# EAGLE board SparkFun_XBee_Arduino_Shield_Qwiic-Panel (EAGLE 9.6.2), part 1 of 3
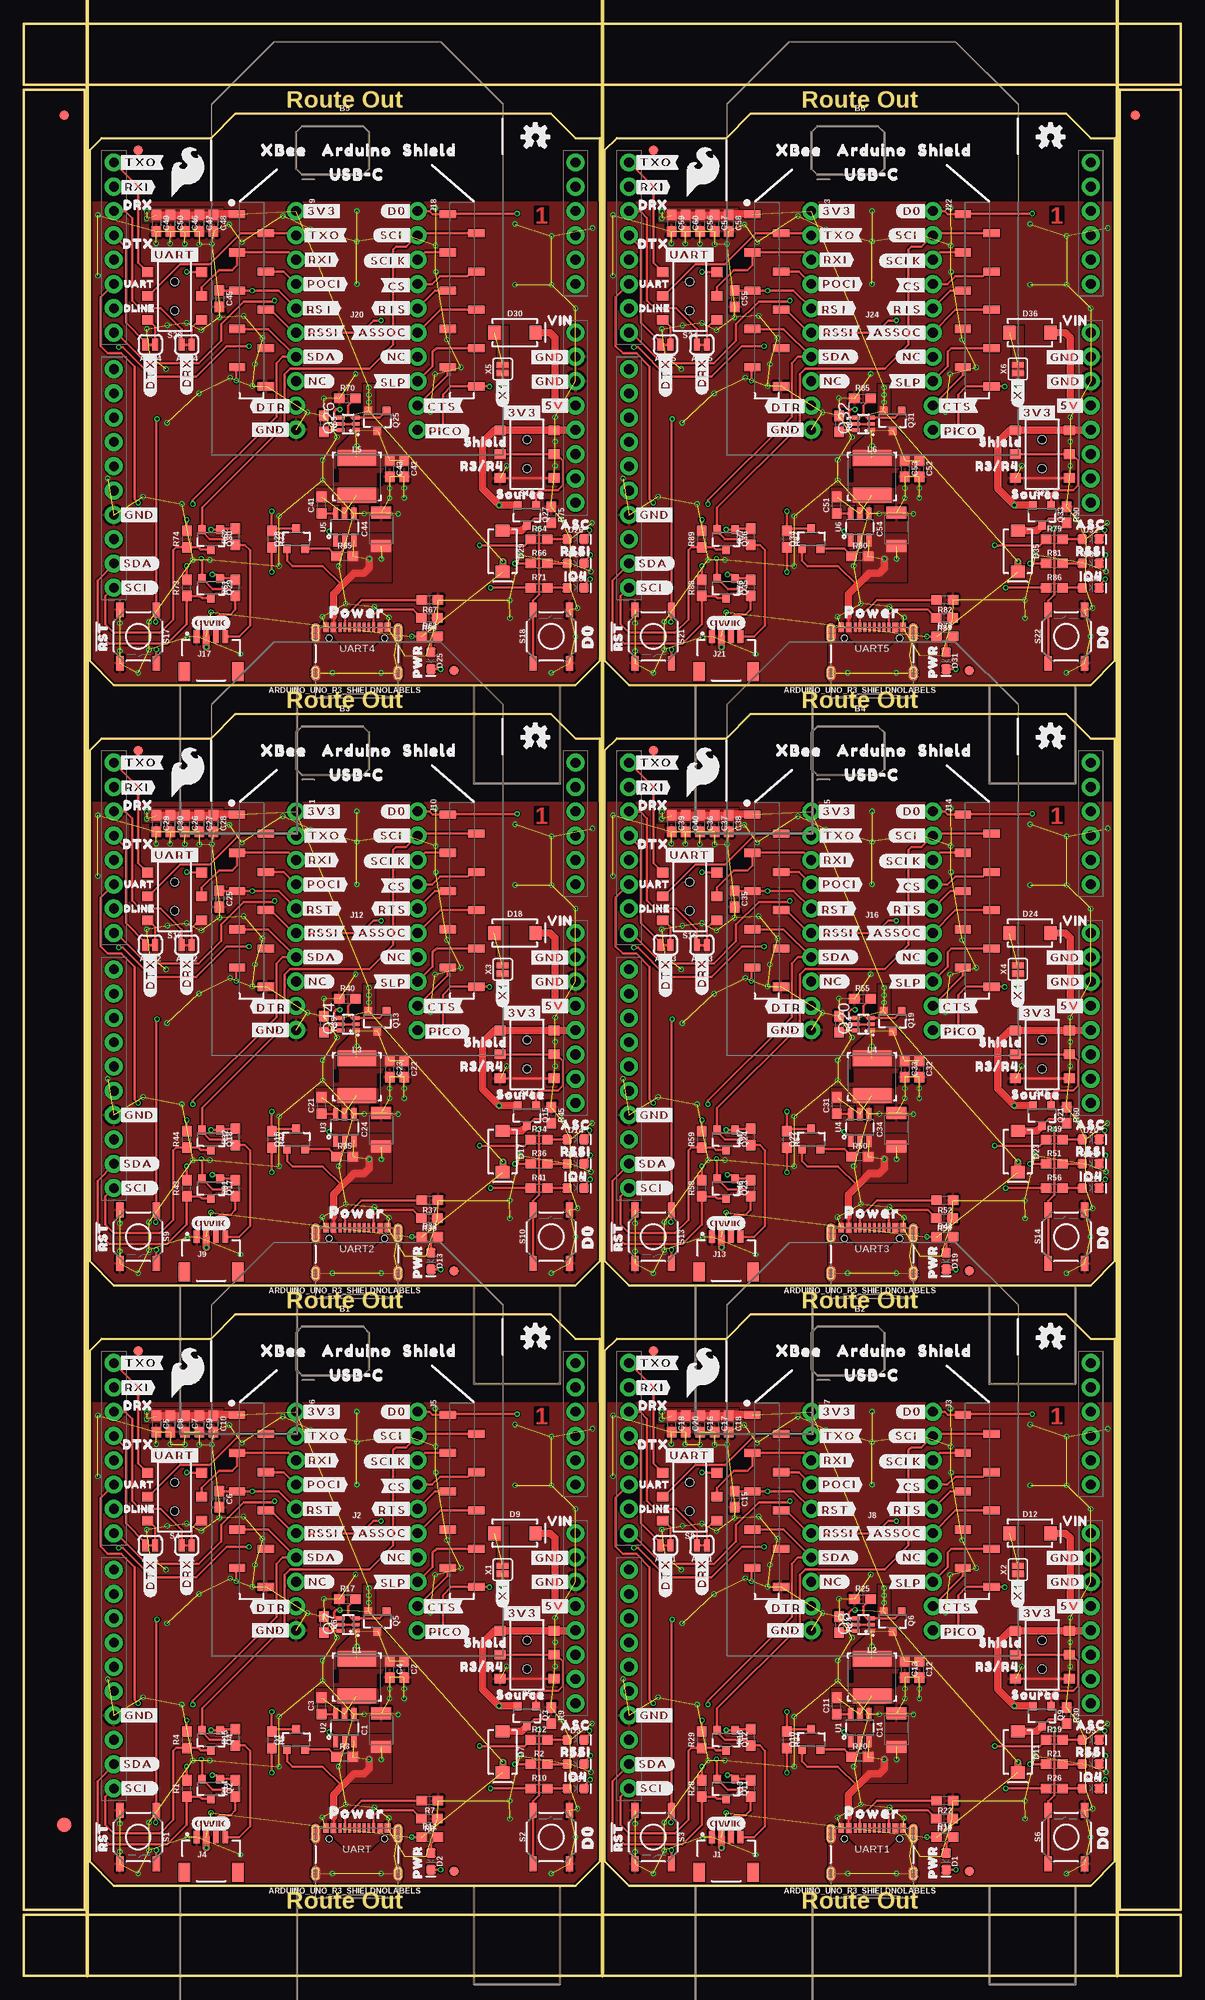
[diagram p0: board, top side]
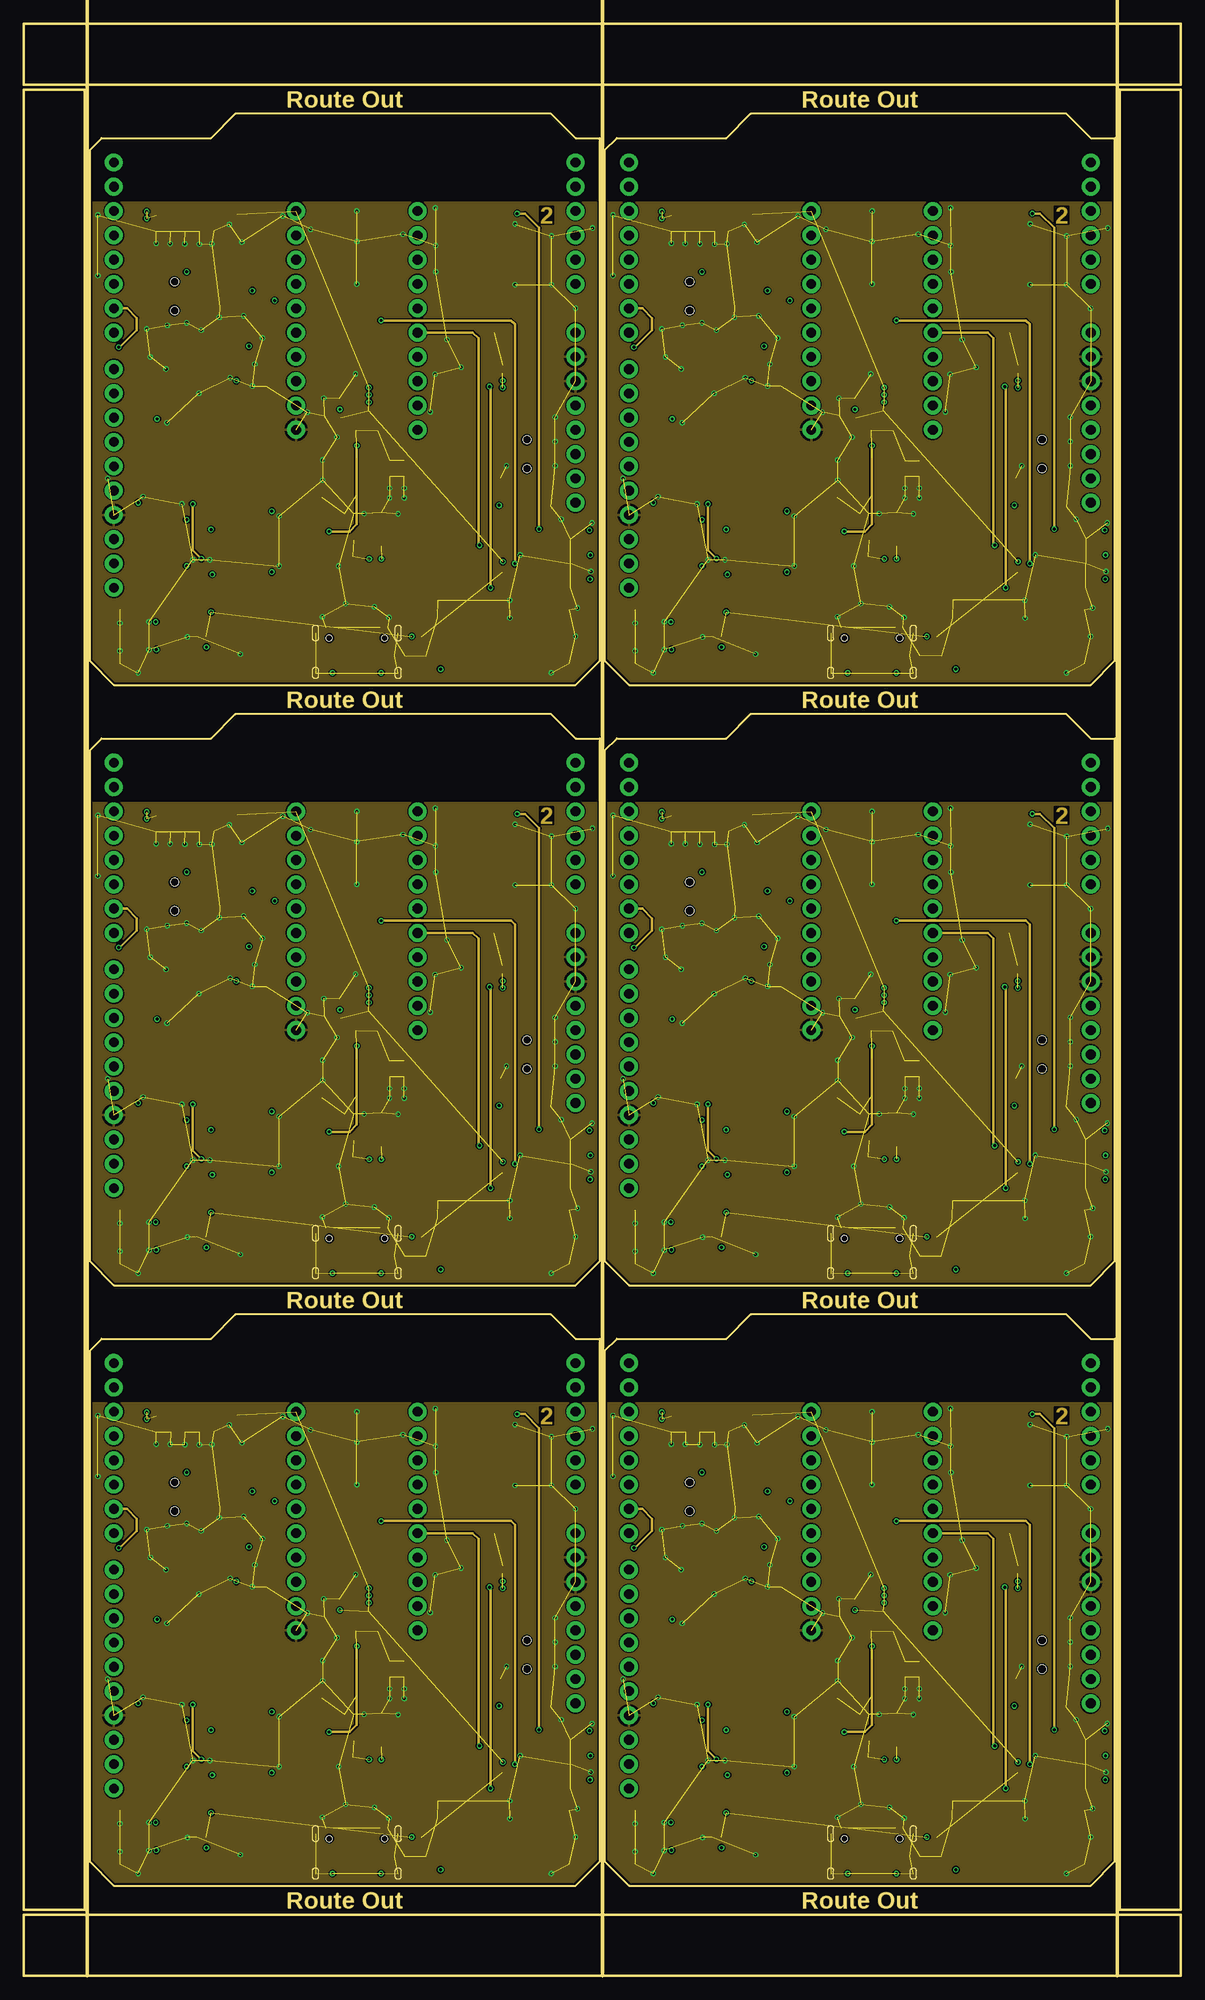
[diagram p1: board, inner layer Route2]
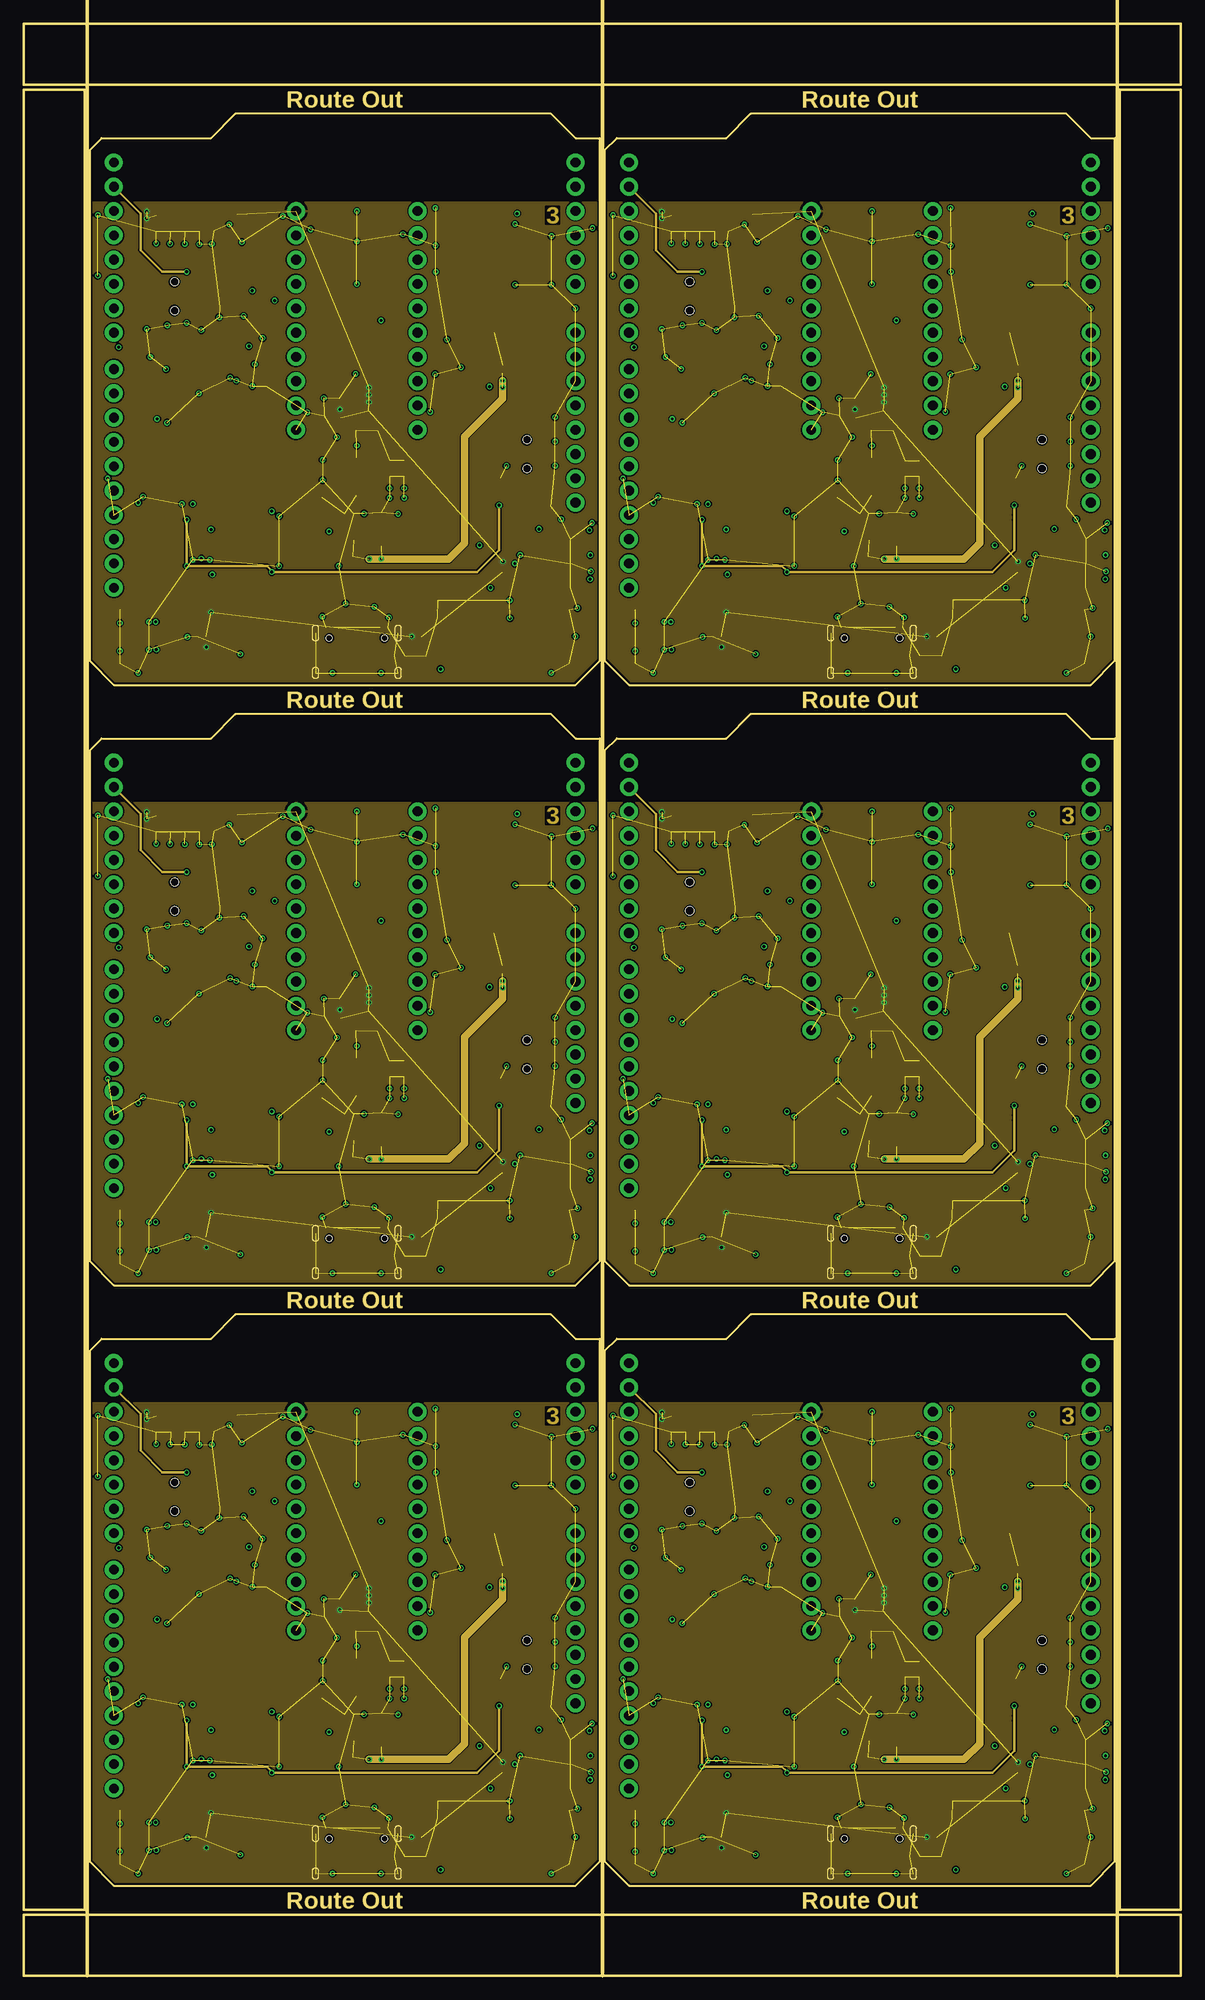
[diagram p2: board, inner layer Route15]
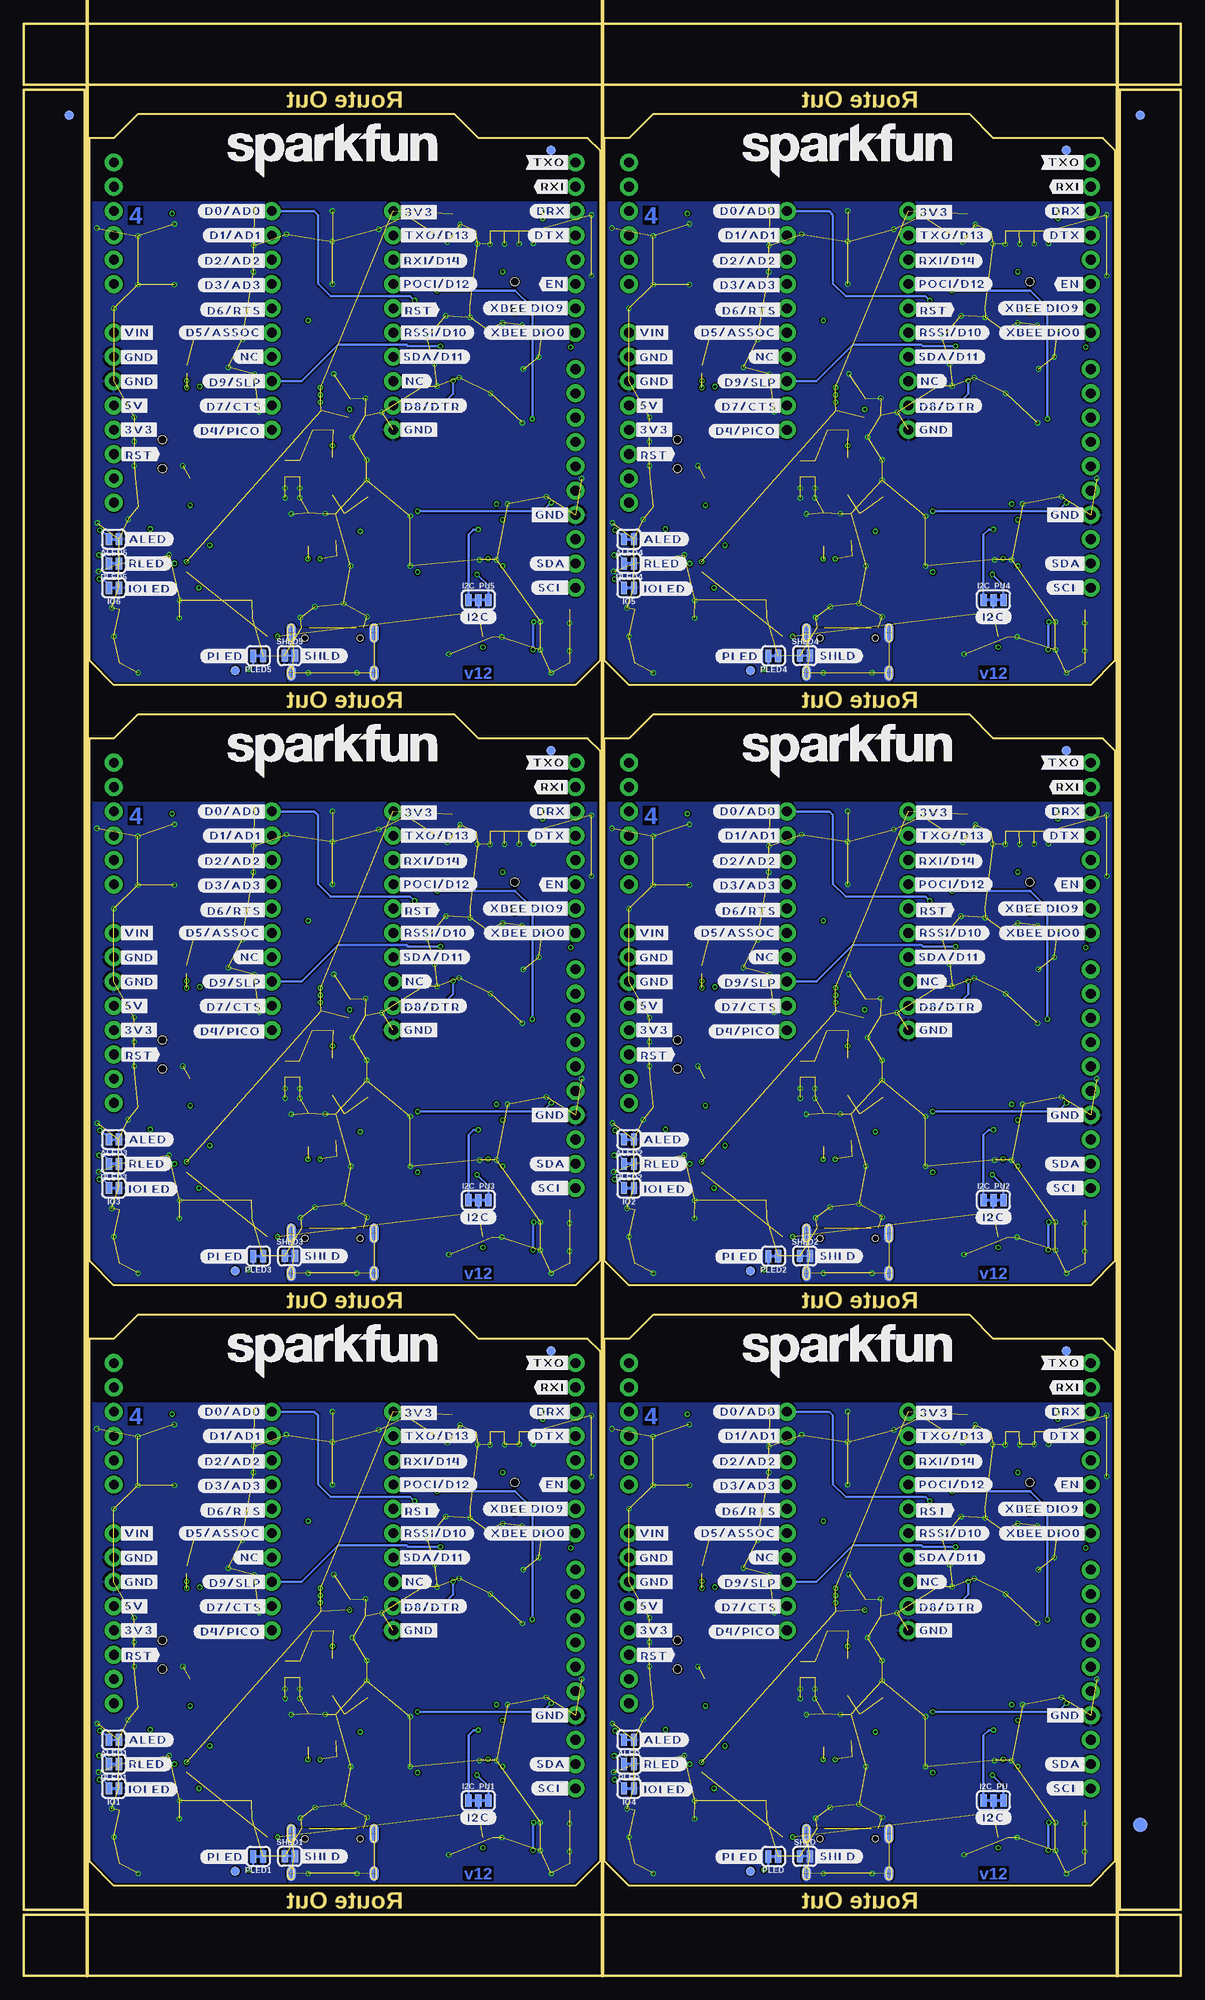
[diagram p3: board, bottom side, seen from below]

Size 120.9 x 203.96 mm. Coordinates in mm from the lower left corner, seen from the top.
Outline: 6.86,65.28 6.86,11.94 9.4,9.4 57.66,9.4 60.2,11.94 60.2,66.55 57.66,66.55 55.12,69.09 22.1,69.09 19.56,66.55 8.13,66.55 6.86,65.28
Outline: 60.71,65.28 60.71,11.94 63.25,9.4 111.51,9.4 114.05,11.94 114.05,66.55 111.51,66.55 108.97,69.09 75.95,69.09 73.41,66.55 61.98,66.55 60.71,65.28
Outline: 6.86,128.02 6.86,74.68 9.4,72.14 57.66,72.14 60.2,74.68 60.2,129.29 57.66,129.29 55.12,131.83 22.1,131.83 19.56,129.29 8.13,129.29 6.86,128.02
Outline: 60.71,128.02 60.71,74.68 63.25,72.14 111.51,72.14 114.05,74.68 114.05,129.29 111.51,129.29 108.97,131.83 75.95,131.83 73.41,129.29 61.98,129.29 60.71,128.02
Outline: 6.86,190.75 6.86,137.41 9.4,134.87 57.66,134.87 60.2,137.41 60.2,192.02 57.66,192.02 55.12,194.56 22.1,194.56 19.56,192.02 8.13,192.02 6.86,190.75
Outline: 60.71,190.75 60.71,137.41 63.25,134.87 111.51,134.87 114.05,137.41 114.05,192.02 111.51,192.02 108.97,194.56 75.95,194.56 73.41,192.02 61.98,192.02 60.71,190.75
Outline: 0,6.35 120.9,6.35 120.9,0 0,0 0,6.35
Outline: 114.55,197.1 120.9,197.1 120.9,6.86 114.55,6.86 114.55,197.1
Outline: 0,203.96 120.9,203.96 120.9,197.61 0,197.61 0,203.96
Outline: 0,197.1 6.35,197.1 6.35,6.86 0,6.86 0,197.1
Copper layers (1*2*15*16): Top 0.035559375mm / dielectric 0.47751875mm / Route2 0.035559375mm / dielectric 0.47751875mm / Route15 0.035559375mm / dielectric 0.47751875mm / Bottom 0.035559375mm
Design rules "SparkFun_XBee_Arduino_Shield_Qwiic": minimum track width 5mil, minimum drill 0.2mm, track to track 5mil, track to pad 5mil, pad to pad 5mil, via to via 5mil, smd to smd 5mil, copper to edge 7mil, drill to drill 7mil, minimum pad ring 5mil, minimum via ring 5mil, stop-mask expansion 2.5mil, vias tented up to drill 25mil, thermal gap 10mil
tRestrict: area 37,30.3 to 37.4,31.4; area 32.4,30.7 to 32.8,31.9; area 90.9,30.3 to 91.3,31.4; area 86.2,30.7 to 86.6,31.9; area 37,93 to 37.4,94.2; area 32.4,93.4 to 32.8,94.6; area 90.9,93 to 91.3,94.2; area 86.2,93.4 to 86.6,94.6; area 37,155.8 to 37.4,156.9; area 32.4,156.2 to 32.8,157.3; area 90.9,155.8 to 91.3,156.9; area 86.2,156.2 to 86.6,157.3
Milling: 4 lines

## Footprints (pad centres in the part's own frame; a part is rotated, then mirrored left to right if it is on the bottom)
SMT-JUMPER_2_NC_TRACE_SILK = smd 0.66 x 1.27: 1 -0.521,0; 2 0.521,0
UNO_R3_SHIELD_NOLABELS = drill 1.016 pad 1.88: 3.3V 24.13,-3.81; 5V 24.13,-1.27; A0 24.13,11.43; A1 24.13,13.97; A2 24.13,16.51; A3 24.13,19.05; A4 24.13,21.59; A5 24.13,24.13; AREF -24.13,-15.24; D2 -24.13,19.05; D3 -24.13,16.51; D4 -24.13,13.97; D5 -24.13,11.43; D6 -24.13,8.89; D7 -24.13,6.35; D8 -24.13,2.54; D9 -24.13,0; D10 -24.13,-2.54; D11 -24.13,-5.08; D12 -24.13,-7.62; D13 -24.13,-10.16; GND@0 24.13,1.27; GND@1 24.13,3.81; GND@2 -24.13,-12.7; IOREF 24.13,-8.89; NC 24.13,-11.43; RES 24.13,-6.35; RX -24.13,24.13; SCL -24.13,-20.32; SDA -24.13,-17.78; TX -24.13,21.59; VIN 24.13,6.35
1210 = smd 1.27 x 2.06: 1 -1.755,0; 2 1.755,0
0603 = smd 1.1 x 1: 1 -0.85,0; 2 0.85,0
LED-0603 = smd 1 x 1: A -0.877,0; C 0.877,0
SMA-DIODE = smd 1.27 x 1.47: A -2.15,0; C 2.15,0
FIDUCIAL-1X2 = smd 1 x 1: 1 0,0
FIDUCIAL-1.5X3 = smd 1.5 x 1.5: 1 0,0
SMT-JUMPER_3_2-NC_TRACE_SILK = smd 0.66 x 1.27: 1 -1.041,0; 2 0,0; 3 1.041,0
JST04_1MM_RA = smd 0.6 x 1.35: 1 -1.5,0; 2 -0.5,0; 3 0.5,0; 4 1.5,0 | smd 1.2 x 2: NC1 2.8,-3.675; NC2 -2.8,-3.675
XBEE3-SMD = smd 1.7 x 0.85: 1 -12.5,11.11; 2 -9.5,9.11; 3 -12.5,7.11; 4 -9.5,5.11; 5 -12.5,3.11; 6 -9.5,1.11; 7 -12.5,-0.89; 8 -9.5,-2.89; 9 -12.5,-4.89; 10 -9.5,-6.89; 11 12.5,-6.89; 12 9.5,-4.89; 13 12.5,-2.89; 14 9.5,-0.89; 15 12.5,1.11; 16 9.5,3.11; 17 12.5,5.11; 18 9.5,7.11; 19 12.5,9.11; 20 9.5,11.11
1X10_NO_SILK = drill 1.016 pad 1.88: 1 0,0; 2 2.54,0; 3 5.08,0; 4 7.62,0; 5 10.16,0; 6 12.7,0; 7 15.24,0; 8 17.78,0; 9 20.32,0; 10 22.86,0
INDUCTOR_3.9UH = smd 4 x 1.6: P$1 0,-2; P$2 0,1.9
SOT23-3 = smd 0.8 x 0.9: 1 -0.95,-1; 2 0.95,-1; 3 0,1.1
SOT363_PHILIPS = smd 0.4 x 0.8: 1 -0.65,-0.8; 2 0,-0.8; 3 0.65,-0.8; 4 0.65,0.8; 5 0,0.8; 6 -0.65,0.8
TACTILE_SWITCH_SMD_5.2MM = smd 1.524 x 0.762: 1 -2.794,1.905; 2 2.794,1.905; 3 -2.794,-1.905; 4 2.794,-1.905
SWITCH_DPDT_SMD_AYZ0202 = smd 1 x 1.15: 1 -2.5,2.825; 2 0,2.825; 3 2.5,2.825; 4 -2.5,-2.825; 5 0,-2.825; 6 2.5,-2.825 | hole 0.85: 1.5,0; -1.5,0
SOT23-6 = smd 0.55 x 1.35: 1 -0.95,-1.375; 2 0,-1.375; 3 0.95,-1.375; 4 0.95,1.375; 5 0,1.375; 6 -0.95,1.375
USB-C-16P-4LAYER-ISOLATED = smd 0.3 x 1: A5 -1.25,-0.34; A6 -0.25,-0.34; A7 0.25,-0.34; A8 1.25,-0.34; B5 1.75,-0.34; B6 0.75,-0.34; B7 -0.75,-0.34; B8 -1.75,-0.34 | smd 0.6 x 1: GND -3.225,-0.34; GND2 3.225,-0.34; VBUS1 -2.45,-0.34; VBUS2 2.45,-0.34 | smd 1 x 2.1: SHLD1 -4.32,-0.915; SHLD2 4.32,-0.915 | smd 1 x 2.1 bottom: SHLD3 -4.32,-0.915; SHLD4 4.32,-0.915 | smd 1 x 1.6: SHLD5 -4.32,-5.095; SHLD8 4.32,-5.095 | smd 1 x 1.6 bottom: SHLD6 -4.32,-5.095; SHLD7 4.32,-5.095 | hole 0.65: -2.89,-1.445; 2.89,-1.445
SMT-JUMPER_2_NO_SILK = smd 0.635 x 1.27: 1 -0.406,0; 2 0.406,0

## Placement (x,y rotation side)
ALED  JUMPER-SMT_2_NC_TRACE_SILK  [SMT-JUMPER_2_NC_TRACE_SILK]  57.66,24.64 180 bottom
ALED1  JUMPER-SMT_2_NC_TRACE_SILK  [SMT-JUMPER_2_NC_TRACE_SILK]  111.51,24.64 180 bottom
ALED2  JUMPER-SMT_2_NC_TRACE_SILK  [SMT-JUMPER_2_NC_TRACE_SILK]  57.66,87.38 180 bottom
ALED3  JUMPER-SMT_2_NC_TRACE_SILK  [SMT-JUMPER_2_NC_TRACE_SILK]  111.51,87.38 180 bottom
ALED4  JUMPER-SMT_2_NC_TRACE_SILK  [SMT-JUMPER_2_NC_TRACE_SILK]  57.66,150.11 180 bottom
ALED5  JUMPER-SMT_2_NC_TRACE_SILK  [SMT-JUMPER_2_NC_TRACE_SILK]  111.51,150.11 180 bottom
ARX  JUMPER-SMT_2_NC_TRACE_SILK  [SMT-JUMPER_2_NC_TRACE_SILK]  17.02,44.96 180 top
ARX1  JUMPER-SMT_2_NC_TRACE_SILK  [SMT-JUMPER_2_NC_TRACE_SILK]  70.87,44.96 180 top
ARX2  JUMPER-SMT_2_NC_TRACE_SILK  [SMT-JUMPER_2_NC_TRACE_SILK]  17.02,107.7 180 top
ARX3  JUMPER-SMT_2_NC_TRACE_SILK  [SMT-JUMPER_2_NC_TRACE_SILK]  70.87,107.7 180 top
ARX4  JUMPER-SMT_2_NC_TRACE_SILK  [SMT-JUMPER_2_NC_TRACE_SILK]  17.02,170.43 180 top
ARX5  JUMPER-SMT_2_NC_TRACE_SILK  [SMT-JUMPER_2_NC_TRACE_SILK]  70.87,170.43 180 top
ATX  JUMPER-SMT_2_NC_TRACE_SILK  [SMT-JUMPER_2_NC_TRACE_SILK]  13.21,44.96 180 top
ATX1  JUMPER-SMT_2_NC_TRACE_SILK  [SMT-JUMPER_2_NC_TRACE_SILK]  67.06,44.96 180 top
ATX2  JUMPER-SMT_2_NC_TRACE_SILK  [SMT-JUMPER_2_NC_TRACE_SILK]  13.21,107.7 180 top
ATX3  JUMPER-SMT_2_NC_TRACE_SILK  [SMT-JUMPER_2_NC_TRACE_SILK]  67.06,107.7 180 top
ATX4  JUMPER-SMT_2_NC_TRACE_SILK  [SMT-JUMPER_2_NC_TRACE_SILK]  13.21,170.43 180 top
ATX5  JUMPER-SMT_2_NC_TRACE_SILK  [SMT-JUMPER_2_NC_TRACE_SILK]  67.06,170.43 180 top
B1  ARDUINO_UNO_R3_SHIELDNOLABELS  [UNO_R3_SHIELD_NOLABELS]  33.53,39.88 0 top
B2  ARDUINO_UNO_R3_SHIELDNOLABELS  [UNO_R3_SHIELD_NOLABELS]  87.38,39.88 0 top
B3  ARDUINO_UNO_R3_SHIELDNOLABELS  [UNO_R3_SHIELD_NOLABELS]  33.53,102.62 0 top
B4  ARDUINO_UNO_R3_SHIELDNOLABELS  [UNO_R3_SHIELD_NOLABELS]  87.38,102.62 0 top
B5  ARDUINO_UNO_R3_SHIELDNOLABELS  [UNO_R3_SHIELD_NOLABELS]  33.53,165.35 0 top
B6  ARDUINO_UNO_R3_SHIELDNOLABELS  [UNO_R3_SHIELD_NOLABELS]  87.38,165.35 0 top
C1  10uF  [1210]  37.34,25.65 90 top
C2  22uF  [0603]  39.75,32 270 top
C3  0.1uF  [0603]  31.12,28.19 90 top
C4  22uF  [0603]  38.23,32 270 top
C5  47pF  [0603]  13.84,57.66 270 top
C6  10nF  [0603]  20.45,49.78 270 top
C7  10nF  [0603]  16.84,57.66 270 top
C8  10pF  [0603]  15.32,57.66 270 top
C9  0.1uF  [0603]  18.34,57.66 270 top
C10  10uF  [0603]  19.81,57.66 270 top
C11  0.1uF  [0603]  84.96,28.19 90 top
C12  22uF  [0603]  93.6,32 270 top
C13  22uF  [0603]  92.08,32 270 top
C14  10uF  [1210]  91.19,25.65 90 top
C15  10nF  [0603]  74.3,49.78 270 top
C16  10nF  [0603]  70.69,57.66 270 top
C17  0.1uF  [0603]  72.19,57.66 270 top
C18  10uF  [0603]  73.66,57.66 270 top
C19  47pF  [0603]  67.69,57.66 270 top
C20  10pF  [0603]  69.16,57.66 270 top
C21  0.1uF  [0603]  31.12,90.93 90 top
C22  22uF  [0603]  39.75,94.74 270 top
C23  22uF  [0603]  38.23,94.74 270 top
C24  10uF  [1210]  37.34,88.39 90 top
C25  10nF  [0603]  20.45,112.52 270 top
C26  10nF  [0603]  16.84,120.4 270 top
C27  0.1uF  [0603]  18.34,120.4 270 top
C28  10uF  [0603]  19.81,120.4 270 top
C29  47pF  [0603]  13.84,120.4 270 top
C30  10pF  [0603]  15.32,120.4 270 top
C31  0.1uF  [0603]  84.96,90.93 90 top
C32  22uF  [0603]  93.6,94.74 270 top
C33  22uF  [0603]  92.08,94.74 270 top
C34  10uF  [1210]  91.19,88.39 90 top
C35  10nF  [0603]  74.3,112.52 270 top
C36  10nF  [0603]  70.69,120.4 270 top
C37  0.1uF  [0603]  72.19,120.4 270 top
C38  10uF  [0603]  73.66,120.4 270 top
C39  47pF  [0603]  67.69,120.4 270 top
C40  10pF  [0603]  69.16,120.4 270 top
C41  0.1uF  [0603]  31.12,153.67 90 top
C42  22uF  [0603]  39.75,157.48 270 top
C43  22uF  [0603]  38.23,157.48 270 top
C44  10uF  [1210]  37.34,151.13 90 top
C45  10nF  [0603]  20.45,175.26 270 top
C46  10nF  [0603]  16.84,183.13 270 top
C47  0.1uF  [0603]  18.34,183.13 270 top
C48  10uF  [0603]  19.81,183.13 270 top
C49  47pF  [0603]  13.84,183.13 270 top
C50  10pF  [0603]  15.32,183.13 270 top
C51  0.1uF  [0603]  84.96,153.67 90 top
C52  22uF  [0603]  93.6,157.48 270 top
C53  22uF  [0603]  92.08,157.48 270 top
C54  10uF  [1210]  91.19,151.13 90 top
C55  10nF  [0603]  74.3,175.26 270 top
C56  10nF  [0603]  70.69,183.13 270 top
C57  0.1uF  [0603]  72.19,183.13 270 top
C58  10uF  [0603]  73.66,183.13 270 top
C59  47pF  [0603]  67.69,183.13 270 top
C60  10pF  [0603]  69.16,183.13 270 top
D1  RED  [LED-0603]  96.39,11.94 270 top
D2  RED  [LED-0603]  42.54,11.94 270 top
D3  BLUE  [LED-0603]  57.66,24.64 0 top
D4  Yellow  [LED-0603]  57.66,22.1 0 top
D5  BLUE  [LED-0603]  111.51,24.64 0 top
D6  GREEN  [LED-0603]  57.66,19.56 0 top
D7  3A/40V/500mV  [SMA-DIODE]  50.04,23.37 270 top
D8  Yellow  [LED-0603]  111.51,22.1 0 top
D9  3A/40V/500mV  [SMA-DIODE]  51.31,46.23 0 top
D10  GREEN  [LED-0603]  111.51,19.56 0 top
D11  3A/40V/500mV  [SMA-DIODE]  103.89,23.37 270 top
D12  3A/40V/500mV  [SMA-DIODE]  105.16,46.23 0 top
D13  RED  [LED-0603]  42.54,74.68 270 top
D14  BLUE  [LED-0603]  57.66,87.38 0 top
D15  Yellow  [LED-0603]  57.66,84.84 0 top
D16  GREEN  [LED-0603]  57.66,82.3 0 top
D17  3A/40V/500mV  [SMA-DIODE]  50.04,86.11 270 top
D18  3A/40V/500mV  [SMA-DIODE]  51.31,108.97 0 top
D19  RED  [LED-0603]  96.39,74.68 270 top
D20  BLUE  [LED-0603]  111.51,87.38 0 top
D21  Yellow  [LED-0603]  111.51,84.84 0 top
D22  GREEN  [LED-0603]  111.51,82.3 0 top
D23  3A/40V/500mV  [SMA-DIODE]  103.89,86.11 270 top
D24  3A/40V/500mV  [SMA-DIODE]  105.16,108.97 0 top
D25  RED  [LED-0603]  42.54,137.41 270 top
D26  BLUE  [LED-0603]  57.66,150.11 0 top
D27  Yellow  [LED-0603]  57.66,147.57 0 top
D28  GREEN  [LED-0603]  57.66,145.03 0 top
D29  3A/40V/500mV  [SMA-DIODE]  50.04,148.84 270 top
D30  3A/40V/500mV  [SMA-DIODE]  51.31,171.7 0 top
D31  RED  [LED-0603]  96.39,137.41 270 top
D32  BLUE  [LED-0603]  111.51,150.11 0 top
D33  Yellow  [LED-0603]  111.51,147.57 0 top
D34  GREEN  [LED-0603]  111.51,145.03 0 top
D35  3A/40V/500mV  [SMA-DIODE]  103.89,148.84 270 top
D36  3A/40V/500mV  [SMA-DIODE]  105.16,171.7 0 top
E$1  [FIDUCIAL-1X2]  4.23,194.44 0 top
E$2  [FIDUCIAL-1X2]  4.23,194.44 0 bottom
E$3  [FIDUCIAL-1X2]  116.16,194.44 0 top
E$4  [FIDUCIAL-1X2]  116.16,194.44 0 bottom
E$5  [FIDUCIAL-1.5X3]  4.23,15.75 0 top
E$6  [FIDUCIAL-1.5X3]  4.23,15.75 0 bottom
FD1  FIDUCIAL1X2  [FIDUCIAL-1X2]  11.94,65.28 0 top
FD2  FIDUCIAL1X2  [FIDUCIAL-1X2]  11.94,65.28 0 bottom
FD3  FIDUCIAL1X2  [FIDUCIAL-1X2]  44.96,10.92 0 top
FD4  FIDUCIAL1X2  [FIDUCIAL-1X2]  44.96,10.92 0 bottom
FD5  FIDUCIAL1X2  [FIDUCIAL-1X2]  65.79,65.28 0 top
FD6  FIDUCIAL1X2  [FIDUCIAL-1X2]  65.79,65.28 0 bottom
FD7  FIDUCIAL1X2  [FIDUCIAL-1X2]  98.81,10.92 0 top
FD8  FIDUCIAL1X2  [FIDUCIAL-1X2]  98.81,10.92 0 bottom
FD9  FIDUCIAL1X2  [FIDUCIAL-1X2]  11.94,128.02 0 top
FD10  FIDUCIAL1X2  [FIDUCIAL-1X2]  11.94,128.02 0 bottom
FD11  FIDUCIAL1X2  [FIDUCIAL-1X2]  44.96,73.66 0 top
FD12  FIDUCIAL1X2  [FIDUCIAL-1X2]  44.96,73.66 0 bottom
FD13  FIDUCIAL1X2  [FIDUCIAL-1X2]  65.79,128.02 0 top
FD14  FIDUCIAL1X2  [FIDUCIAL-1X2]  65.79,128.02 0 bottom
FD15  FIDUCIAL1X2  [FIDUCIAL-1X2]  98.81,73.66 0 top
FD16  FIDUCIAL1X2  [FIDUCIAL-1X2]  98.81,73.66 0 bottom
FD17  FIDUCIAL1X2  [FIDUCIAL-1X2]  11.94,190.75 0 top
FD18  FIDUCIAL1X2  [FIDUCIAL-1X2]  11.94,190.75 0 bottom
FD19  FIDUCIAL1X2  [FIDUCIAL-1X2]  44.96,136.4 0 top
FD20  FIDUCIAL1X2  [FIDUCIAL-1X2]  44.96,136.4 0 bottom
FD21  FIDUCIAL1X2  [FIDUCIAL-1X2]  65.79,190.75 0 top
FD22  FIDUCIAL1X2  [FIDUCIAL-1X2]  65.79,190.75 0 bottom
FD23  FIDUCIAL1X2  [FIDUCIAL-1X2]  98.81,136.4 0 top
FD24  FIDUCIAL1X2  [FIDUCIAL-1X2]  98.81,136.4 0 bottom
I2C_PU  JUMPER-SMT_3_2-NC_TRACE_SILK  [SMT-JUMPER_3_2-NC_TRACE_SILK]  19.56,18.29 0 bottom
I2C_PU1  JUMPER-SMT_3_2-NC_TRACE_SILK  [SMT-JUMPER_3_2-NC_TRACE_SILK]  73.41,18.29 0 bottom
I2C_PU2  JUMPER-SMT_3_2-NC_TRACE_SILK  [SMT-JUMPER_3_2-NC_TRACE_SILK]  19.56,81.03 0 bottom
I2C_PU3  JUMPER-SMT_3_2-NC_TRACE_SILK  [SMT-JUMPER_3_2-NC_TRACE_SILK]  73.41,81.03 0 bottom
I2C_PU4  JUMPER-SMT_3_2-NC_TRACE_SILK  [SMT-JUMPER_3_2-NC_TRACE_SILK]  19.56,143.76 0 bottom
I2C_PU5  JUMPER-SMT_3_2-NC_TRACE_SILK  [SMT-JUMPER_3_2-NC_TRACE_SILK]  73.41,143.76 0 bottom
IO1  JUMPER-SMT_2_NC_TRACE_SILK  [SMT-JUMPER_2_NC_TRACE_SILK]  111.51,19.56 180 bottom
IO2  JUMPER-SMT_2_NC_TRACE_SILK  [SMT-JUMPER_2_NC_TRACE_SILK]  57.66,82.3 180 bottom
IO3  JUMPER-SMT_2_NC_TRACE_SILK  [SMT-JUMPER_2_NC_TRACE_SILK]  111.51,82.3 180 bottom
IO4  JUMPER-SMT_2_NC_TRACE_SILK  [SMT-JUMPER_2_NC_TRACE_SILK]  57.66,19.56 180 bottom
IO5  JUMPER-SMT_2_NC_TRACE_SILK  [SMT-JUMPER_2_NC_TRACE_SILK]  57.66,145.03 180 bottom
IO6  JUMPER-SMT_2_NC_TRACE_SILK  [SMT-JUMPER_2_NC_TRACE_SILK]  111.51,145.03 180 bottom
J1  QWIIC_RIGHT_ANGLE  [JST04_1MM_RA]  73.41,14.48 0 top
J2  [XBEE3-SMD]  34.8,47.5 0 top
J3  [1X10_NO_SILK]  95,58.93 270 top
J4  QWIIC_RIGHT_ANGLE  [JST04_1MM_RA]  19.56,14.48 0 top
J5  [1X10_NO_SILK]  41.15,58.93 270 top
J6  [1X10_NO_SILK]  28.45,58.93 270 top
J7  [1X10_NO_SILK]  82.3,58.93 270 top
J8  [XBEE3-SMD]  88.65,47.5 0 top
J9  QWIIC_RIGHT_ANGLE  [JST04_1MM_RA]  19.56,77.22 0 top
J10  [1X10_NO_SILK]  41.15,121.67 270 top
J11  [1X10_NO_SILK]  28.45,121.67 270 top
J12  [XBEE3-SMD]  34.8,110.24 0 top
J13  QWIIC_RIGHT_ANGLE  [JST04_1MM_RA]  73.41,77.22 0 top
J14  [1X10_NO_SILK]  95,121.67 270 top
J15  [1X10_NO_SILK]  82.3,121.67 270 top
J16  [XBEE3-SMD]  88.65,110.24 0 top
J17  QWIIC_RIGHT_ANGLE  [JST04_1MM_RA]  19.56,139.95 0 top
J18  [1X10_NO_SILK]  41.15,184.4 270 top
J19  [1X10_NO_SILK]  28.45,184.4 270 top
J20  [XBEE3-SMD]  34.8,172.97 0 top
J21  QWIIC_RIGHT_ANGLE  [JST04_1MM_RA]  73.41,139.95 0 top
J22  [1X10_NO_SILK]  95,184.4 270 top
J23  [1X10_NO_SILK]  82.3,184.4 270 top
J24  [XBEE3-SMD]  88.65,172.97 0 top
L1  3.9UH  [INDUCTOR_3.9UH]  34.8,31.24 0 top
L2  3.9UH  [INDUCTOR_3.9UH]  88.65,31.24 0 top
L3  3.9UH  [INDUCTOR_3.9UH]  34.8,93.98 0 top
L4  3.9UH  [INDUCTOR_3.9UH]  88.65,93.98 0 top
L5  3.9UH  [INDUCTOR_3.9UH]  34.8,156.72 0 top
L6  3.9UH  [INDUCTOR_3.9UH]  88.65,156.72 0 top
LOGO1  SFE_LOGO_NAMEBLANK  [BLANK]  6.86,9.4 0 top
LOGO2  OSHW-LOGOS  [OSHW-LOGO-S]  53.47,66.67 0 top
LOGO3  QWIIC_LOGO_4MM  [QWIIC_4MM]  19.56,15.88 0 top
LOGO4  OSHW-LOGOS  [OSHW-LOGO-S]  107.31,66.67 0 top
LOGO5  QWIIC_LOGO_4MM  [QWIIC_4MM]  73.41,15.88 0 top
LOGO6  SFE_LOGO_NAMEBLANK  [BLANK]  60.71,9.4 0 top
LOGO7  OSHW-LOGOS  [OSHW-LOGO-S]  53.47,129.41 0 top
LOGO8  QWIIC_LOGO_4MM  [QWIIC_4MM]  19.56,78.61 0 top
LOGO9  SFE_LOGO_NAMEBLANK  [BLANK]  6.86,72.14 0 top
LOGO10  OSHW-LOGOS  [OSHW-LOGO-S]  107.31,129.41 0 top
LOGO11  QWIIC_LOGO_4MM  [QWIIC_4MM]  73.41,78.61 0 top
LOGO12  SFE_LOGO_NAMEBLANK  [BLANK]  60.71,72.14 0 top
LOGO13  OSHW-LOGOS  [OSHW-LOGO-S]  53.47,192.15 0 top
LOGO14  QWIIC_LOGO_4MM  [QWIIC_4MM]  19.56,141.35 0 top
LOGO15  SFE_LOGO_NAMEBLANK  [BLANK]  6.86,134.87 0 top
LOGO16  OSHW-LOGOS  [OSHW-LOGO-S]  107.31,192.15 0 top
LOGO17  QWIIC_LOGO_4MM  [QWIIC_4MM]  73.41,141.35 0 top
LOGO18  SFE_LOGO_NAMEBLANK  [BLANK]  60.71,134.87 0 top
PLED  JUMPER-SMT_2_NC_TRACE_SILK  [SMT-JUMPER_2_NC_TRACE_SILK]  42.57,12.45 180 bottom
PLED1  JUMPER-SMT_2_NC_TRACE_SILK  [SMT-JUMPER_2_NC_TRACE_SILK]  96.42,12.45 180 bottom
PLED2  JUMPER-SMT_2_NC_TRACE_SILK  [SMT-JUMPER_2_NC_TRACE_SILK]  42.57,75.18 180 bottom
PLED3  JUMPER-SMT_2_NC_TRACE_SILK  [SMT-JUMPER_2_NC_TRACE_SILK]  96.42,75.18 180 bottom
PLED4  JUMPER-SMT_2_NC_TRACE_SILK  [SMT-JUMPER_2_NC_TRACE_SILK]  42.57,137.92 180 bottom
PLED5  JUMPER-SMT_2_NC_TRACE_SILK  [SMT-JUMPER_2_NC_TRACE_SILK]  96.42,137.92 180 bottom
Q1  220mA/50V/3.5Ω  [SOT23-3]  28.45,24.64 0 top
Q2  220mA/50V/3.5Ω  [SOT23-3]  19.56,19.56 180 top
Q3  3.1A/30V/105mΩ  [SOT23-3]  52.58,27.18 180 top
Q4  220mA/50V/3.5Ω  [SOT23-3]  19.56,24.64 180 top
Q5  20V/4.2A/52mΩ/1.4W  [SOT23-3]  36.96,37.06 180 top
Q6  20V/4.2A/52mΩ/1.4W  [SOT23-3]  90.81,37.06 180 top
Q7  [SOT363_PHILIPS]  33.91,36.68 90 top
Q8  [SOT363_PHILIPS]  87.76,36.68 90 top
Q9  3.1A/30V/105mΩ  [SOT23-3]  106.43,27.18 180 top
Q10  220mA/50V/3.5Ω  [SOT23-3]  82.3,24.64 0 top
Q11  220mA/50V/3.5Ω  [SOT23-3]  73.41,19.56 180 top
Q12  220mA/50V/3.5Ω  [SOT23-3]  73.41,24.64 180 top
Q13  20V/4.2A/52mΩ/1.4W  [SOT23-3]  36.96,99.8 180 top
Q14  [SOT363_PHILIPS]  33.91,99.42 90 top
Q15  3.1A/30V/105mΩ  [SOT23-3]  52.58,89.92 180 top
Q16  220mA/50V/3.5Ω  [SOT23-3]  28.45,87.38 0 top
Q17  220mA/50V/3.5Ω  [SOT23-3]  19.56,82.3 180 top
Q18  220mA/50V/3.5Ω  [SOT23-3]  19.56,87.38 180 top
Q19  20V/4.2A/52mΩ/1.4W  [SOT23-3]  90.81,99.8 180 top
Q20  [SOT363_PHILIPS]  87.76,99.42 90 top
Q21  3.1A/30V/105mΩ  [SOT23-3]  106.43,89.92 180 top
Q22  220mA/50V/3.5Ω  [SOT23-3]  82.3,87.38 0 top
Q23  220mA/50V/3.5Ω  [SOT23-3]  73.41,82.3 180 top
Q24  220mA/50V/3.5Ω  [SOT23-3]  73.41,87.38 180 top
Q25  20V/4.2A/52mΩ/1.4W  [SOT23-3]  36.96,162.53 180 top
Q26  [SOT363_PHILIPS]  33.91,162.15 90 top
Q27  3.1A/30V/105mΩ  [SOT23-3]  52.58,152.65 180 top
Q28  220mA/50V/3.5Ω  [SOT23-3]  28.45,150.11 0 top
Q29  220mA/50V/3.5Ω  [SOT23-3]  19.56,145.03 180 top
Q30  220mA/50V/3.5Ω  [SOT23-3]  19.56,150.11 180 top
Q31  20V/4.2A/52mΩ/1.4W  [SOT23-3]  90.81,162.53 180 top
Q32  [SOT363_PHILIPS]  87.76,162.15 90 top
Q33  3.1A/30V/105mΩ  [SOT23-3]  106.43,152.65 180 top
Q34  220mA/50V/3.5Ω  [SOT23-3]  82.3,150.11 0 top
Q35  220mA/50V/3.5Ω  [SOT23-3]  73.41,145.03 180 top
Q36  220mA/50V/3.5Ω  [SOT23-3]  73.41,150.11 180 top
R1  2.2k  [0603]  17.02,19.56 90 top
R2  2.2k  [0603]  53.85,22.1 0 top
R3  100k  [0603]  33.53,22.86 0 top
R4  2.2k  [0603]  17.02,24.64 90 top
R5  10k  [0603]  25.91,24.64 270 top
R6  100k  [0603]  31.37,36.68 270 top
R7  5.1k  [0603]  42.42,18.29 180 top
R8  5.1k  [0603]  42.37,16.41 180 top
R9  100k  [0603]  55.12,27.18 270 top
R10  330  [0603]  53.85,19.56 0 top
R11  4.7k  [0603]  42.42,14.48 0 top
R12  2.2k  [0603]  53.85,24.64 0 top
R13  2.2k  [0603]  75.95,19.56 90 top
R14  2.2k  [0603]  22.1,19.56 90 top
R15  2.2k  [0603]  22.1,24.89 90 top
R16  2.2k  [0603]  75.95,24.89 90 top
R17  1M  [0603]  33.81,39.34 0 top
R18  4.7k  [0603]  96.27,14.48 0 top
R19  2.2k  [0603]  107.7,24.64 0 top
R20  100k  [0603]  87.38,22.86 0 top
R21  2.2k  [0603]  107.7,22.1 0 top
R22  5.1k  [0603]  96.27,18.29 180 top
R23  5.1k  [0603]  96.22,16.41 180 top
R24  100k  [0603]  85.22,36.68 270 top
R25  1M  [0603]  87.66,39.34 0 top
R26  330  [0603]  107.7,19.56 0 top
R27  10k  [0603]  79.76,24.64 270 top
R28  2.2k  [0603]  70.87,19.56 90 top
R29  2.2k  [0603]  70.87,24.64 90 top
R30  100k  [0603]  108.97,27.18 270 top
R31  2.2k  [0603]  22.1,82.3 90 top
R32  2.2k  [0603]  22.1,87.63 90 top
R33  4.7k  [0603]  42.42,77.22 0 top
R34  2.2k  [0603]  53.85,87.38 0 top
R35  100k  [0603]  33.53,85.6 0 top
R36  2.2k  [0603]  53.85,84.84 0 top
R37  5.1k  [0603]  42.42,81.03 180 top
R38  5.1k  [0603]  42.37,79.15 180 top
R39  100k  [0603]  31.37,99.42 270 top
R40  1M  [0603]  33.81,102.08 0 top
R41  330  [0603]  53.85,82.3 0 top
R42  10k  [0603]  25.91,87.38 270 top
R43  2.2k  [0603]  17.02,82.3 90 top
R44  2.2k  [0603]  17.02,87.38 90 top
R45  100k  [0603]  55.12,89.92 270 top
R46  2.2k  [0603]  75.95,82.3 90 top
R47  2.2k  [0603]  75.95,87.63 90 top
R48  4.7k  [0603]  96.27,77.22 0 top
R49  2.2k  [0603]  107.7,87.38 0 top
R50  100k  [0603]  87.38,85.6 0 top
R51  2.2k  [0603]  107.7,84.84 0 top
R52  5.1k  [0603]  96.27,81.03 180 top
R53  5.1k  [0603]  96.22,79.15 180 top
R54  100k  [0603]  85.22,99.42 270 top
R55  1M  [0603]  87.66,102.08 0 top
R56  330  [0603]  107.7,82.3 0 top
R57  10k  [0603]  79.76,87.38 270 top
R58  2.2k  [0603]  70.87,82.3 90 top
R59  2.2k  [0603]  70.87,87.38 90 top
R60  100k  [0603]  108.97,89.92 270 top
R61  2.2k  [0603]  22.1,145.03 90 top
R62  2.2k  [0603]  22.1,150.37 90 top
R63  4.7k  [0603]  42.42,139.95 0 top
R64  2.2k  [0603]  53.85,150.11 0 top
R65  100k  [0603]  33.53,148.34 0 top
R66  2.2k  [0603]  53.85,147.57 0 top
R67  5.1k  [0603]  42.42,143.76 180 top
R68  5.1k  [0603]  42.37,141.88 180 top
R69  100k  [0603]  31.37,162.15 270 top
R70  1M  [0603]  33.81,164.82 0 top
R71  330  [0603]  53.85,145.03 0 top
R72  10k  [0603]  25.91,150.11 270 top
R73  2.2k  [0603]  17.02,145.03 90 top
R74  2.2k  [0603]  17.02,150.11 90 top
R75  100k  [0603]  55.12,152.65 270 top
R76  2.2k  [0603]  75.95,145.03 90 top
R77  2.2k  [0603]  75.95,150.37 90 top
R78  4.7k  [0603]  96.27,139.95 0 top
R79  2.2k  [0603]  107.7,150.11 0 top
R80  100k  [0603]  87.38,148.34 0 top
R81  2.2k  [0603]  107.7,147.57 0 top
R82  5.1k  [0603]  96.27,143.76 180 top
R83  5.1k  [0603]  96.22,141.88 180 top
R84  100k  [0603]  85.22,162.15 270 top
R85  1M  [0603]  87.66,164.82 0 top
R86  330  [0603]  107.7,145.03 0 top
R87  10k  [0603]  79.76,150.11 270 top
R88  2.2k  [0603]  70.87,145.03 90 top
R89  2.2k  [0603]  70.87,150.11 90 top
R90  100k  [0603]  108.97,152.65 270 top
RLED  JUMPER-SMT_2_NC_TRACE_SILK  [SMT-JUMPER_2_NC_TRACE_SILK]  57.66,22.1 180 bottom
RLED1  JUMPER-SMT_2_NC_TRACE_SILK  [SMT-JUMPER_2_NC_TRACE_SILK]  111.51,22.1 180 bottom
RLED2  JUMPER-SMT_2_NC_TRACE_SILK  [SMT-JUMPER_2_NC_TRACE_SILK]  57.66,84.84 180 bottom
RLED3  JUMPER-SMT_2_NC_TRACE_SILK  [SMT-JUMPER_2_NC_TRACE_SILK]  111.51,84.84 180 bottom
RLED4  JUMPER-SMT_2_NC_TRACE_SILK  [SMT-JUMPER_2_NC_TRACE_SILK]  57.66,147.57 180 bottom
RLED5  JUMPER-SMT_2_NC_TRACE_SILK  [SMT-JUMPER_2_NC_TRACE_SILK]  111.51,147.57 180 bottom
S1  [TACTILE_SWITCH_SMD_5.2MM]  11.94,14.48 270 top
S2  [TACTILE_SWITCH_SMD_5.2MM]  55.12,14.48 90 top
S3  [TACTILE_SWITCH_SMD_5.2MM]  65.79,14.48 270 top
S4  [SWITCH_DPDT_SMD_AYZ0202]  15.75,50.04 90 top
S5  [SWITCH_DPDT_SMD_AYZ0202]  52.58,33.53 90 top
S6  [TACTILE_SWITCH_SMD_5.2MM]  108.97,14.48 90 top
S7  [SWITCH_DPDT_SMD_AYZ0202]  106.43,33.53 90 top
S8  [SWITCH_DPDT_SMD_AYZ0202]  69.6,50.04 90 top
S9  [TACTILE_SWITCH_SMD_5.2MM]  11.94,77.22 270 top
S10  [TACTILE_SWITCH_SMD_5.2MM]  55.12,77.22 90 top
S11  [SWITCH_DPDT_SMD_AYZ0202]  52.58,96.27 90 top
S12  [SWITCH_DPDT_SMD_AYZ0202]  15.75,112.78 90 top
S13  [TACTILE_SWITCH_SMD_5.2MM]  65.79,77.22 270 top
S14  [TACTILE_SWITCH_SMD_5.2MM]  108.97,77.22 90 top
S15  [SWITCH_DPDT_SMD_AYZ0202]  106.43,96.27 90 top
S16  [SWITCH_DPDT_SMD_AYZ0202]  69.6,112.78 90 top
S17  [TACTILE_SWITCH_SMD_5.2MM]  11.94,139.95 270 top
S18  [TACTILE_SWITCH_SMD_5.2MM]  55.12,139.95 90 top
S19  [SWITCH_DPDT_SMD_AYZ0202]  52.58,159 90 top
S20  [SWITCH_DPDT_SMD_AYZ0202]  15.75,175.51 90 top
S21  [TACTILE_SWITCH_SMD_5.2MM]  65.79,139.95 270 top
S22  [TACTILE_SWITCH_SMD_5.2MM]  108.97,139.95 90 top
S23  [SWITCH_DPDT_SMD_AYZ0202]  106.43,159 90 top
S24  [SWITCH_DPDT_SMD_AYZ0202]  69.6,175.51 90 top
SHLD  JUMPER-SMT_2_NC_TRACE_SILK  [SMT-JUMPER_2_NC_TRACE_SILK]  39.27,12.47 0 bottom
SHLD1  JUMPER-SMT_2_NC_TRACE_SILK  [SMT-JUMPER_2_NC_TRACE_SILK]  93.12,12.47 0 bottom
SHLD2  JUMPER-SMT_2_NC_TRACE_SILK  [SMT-JUMPER_2_NC_TRACE_SILK]  39.27,75.21 0 bottom
SHLD3  JUMPER-SMT_2_NC_TRACE_SILK  [SMT-JUMPER_2_NC_TRACE_SILK]  93.12,75.21 0 bottom
SHLD4  JUMPER-SMT_2_NC_TRACE_SILK  [SMT-JUMPER_2_NC_TRACE_SILK]  39.27,137.95 0 bottom
SHLD5  JUMPER-SMT_2_NC_TRACE_SILK  [SMT-JUMPER_2_NC_TRACE_SILK]  93.12,137.95 0 bottom
U1  AP63203  [SOT23-6]  87.38,25.91 0 top
U2  AP63203  [SOT23-6]  33.53,25.91 0 top
U3  AP63203  [SOT23-6]  33.53,88.65 0 top
U4  AP63203  [SOT23-6]  87.38,88.65 0 top
U5  AP63203  [SOT23-6]  33.53,151.38 0 top
U6  AP63203  [SOT23-6]  87.38,151.38 0 top
U$1  [RSSI31]  57.66,23.37 0 top
U$2  [PWR29]  41.15,11.84 90 top
U$3  [#SDA#10]  11.94,22.1 0 top
U$4  [#SHLD#36]  35.81,12.45 0 bottom
U$5  [#NC#1]  26.16,41.15 0 bottom
U$6  [#D3#AD3#23]  45.21,51.18 0 bottom
U$7  [#NC#3]  43.43,43.69 0 bottom
U$8  [##DTR##27]  25.83,38.53 0 top
U$9  [#NC#1]  30.73,41.15 0 top
U$10  [#NC#3]  38.99,43.69 0 top
U$11  [#D1#AD1#8]  44.96,56.39 0 bottom
U$12  [##CTS##28]  43.69,38.61 0 top
U$13  [#D8##DTR##27]  24.38,38.61 0 bottom
U$14  [#RSSI#D10#17]  24,46.23 0 bottom
U$15  [#SDA#D11#9]  24.26,43.69 0 bottom
U$16  [##RST##15]  25.78,48.64 0 bottom
U$17  [#POCI#D12#24]  23.88,51.31 0 bottom
U$18  [#RXI#D14#15]  24.38,53.72 0 bottom
U$19  [#D2#AD2#19]  45.21,53.72 0 bottom
U$20  [#D6##RTS##25]  45.08,48.64 0 bottom
U$21  [#TXO#8]  31.37,56.39 0 top
U$22  [#TXO#D13#13]  23.88,56.39 0 bottom
U$23  [VIN5]  56.03,47.5 0 top
U$24  [#SCL#7]  11.94,19.56 0 top
U$25  [#GND#0]  12.06,27.18 0 top
U$26  [#I2C#33]  19.56,16.51 0 bottom
U$27  [#RXI#7]  30.96,53.82 0 top
U$28  [DRX52]  11.94,59.56 0 top
U$29  [#GND#0]  54.99,41.12 0 top
U$30  [#RST#30]  8.13,14.48 90 top
U$31  [#PICO#27]  44.09,35.92 0 top
U$32  [#TXO#8]  12.19,64.01 0 top
U$33  [#RXI#7]  11.79,61.44 0 top
U$34  [DTX53]  11.94,55.5 0 top
U$35  [#D5#ASSOC#25]  46.23,46.23 0 bottom
U$36  [#D9##SLP##28]  44.96,41.15 0 bottom
U$37  [#D7##CTS##26]  45.08,38.61 0 bottom
U$38  [#D4#PICO#25]  45.47,35.94 0 bottom
U$39  [#5V#5]  55.5,38.61 0 top
U$40  [D03]  58.93,14.48 90 top
U$41  [#GND#0]  54.97,43.64 0 top
U$42  [DLINE45]  12.06,48.77 0 top
U$43  [#X1#10]  50.04,40.08 90 top
U$44  [#3V3#1]  52.07,37.85 0 top
U$45  [#POCI#32]  31.37,51.31 0 top
U$46  [SHIELD55]  48.26,34.8 0 top
U$47  [#3V3#1]  31.12,58.93 0 top
U$48  [UART44]  12.06,51.31 0 top
U$49  [#ALED#21]  54.1,24.64 0 bottom
U$50  [#GND#0]  25.76,36.07 0 top
U$51  [#RLED#22]  54.2,22.1 0 bottom
U$52  [#PLED#20]  46.02,12.4 0 bottom
U$53  [#GND#0]  55.02,43.64 0 bottom
U$54  [##RST##13]  30.99,48.77 0 top
U$55  [#RSSI#16]  31.24,46.23 0 top
U$56  [#SDA#10]  31.12,43.69 0 top
U$57  [#ASSOC#28]  37.46,46.23 0 top
U$58  [##RTS##14]  38.48,48.77 0 top
U$59  [##CS##26]  38.99,51.18 0 top
U$60  [#SCLK#33]  38.1,53.72 0 top
U$61  [SFE_LOGO_FLAME_.2]  17.14,62.99 0 top
U$62  [SFE_LOGO_NAME_.2]  34.8,65.28 0 bottom
U$63  [#GND#0]  54.99,41.12 0 bottom
U$64  [#SCL#9]  38.61,56.39 0 top
U$65  [#D0#3]  38.99,58.93 0 top
U$66  [#5V#5]  55.5,38.61 0 bottom
U$67  [#SDA#9]  11.94,22.1 0 bottom
U$68  [##SLP##28]  38.61,41.15 0 top
U$69  [R3#R455]  47.88,32.26 0 top
U$70  [#SCL#13]  11.94,19.56 0 bottom
U$71  [#DRX#56]  17.02,42.04 90 top
U$72  [#DTX#57]  13.21,41.91 90 top
U$73  [#TXO#61]  12.19,64.01 0 bottom
U$74  [ASC32]  57.66,26.16 0 top
U$75  [POWER49]  34.8,17.02 0 top
U$76  [#GND#0]  25.78,36.07 0 bottom
U$77  [#3V3#1]  25.78,58.8 0 bottom
U$78  [#D0#AD0#18]  45.21,58.93 0 bottom
U$79  [ARDUINO1345]  34.8,65.28 0 top
U$80  [XBEE340]  27.18,65.28 0 top
U$81  [SHIELD1346]  42.42,65.28 0 top
U$82  [#GND#0]  12.06,27.18 0 bottom
U$83  [#EN#15]  11.56,51.31 0 bottom
U$84  [#3V3#1]  55.04,36.07 0 bottom
U$85  [#RXI#60]  11.81,61.47 0 bottom
U$86  [#DRX#56]  11.94,58.93 0 bottom
U$87  [##RST##13]  54.99,33.53 0 bottom
U$88  [#VIN#4]  55.24,46.23 0 bottom
U$89  [#DTX#57]  12.06,56.39 0 bottom
U$90  [#XBEE_DIO0#62]  14.35,46.23 0 bottom
U$91  [#UART#4048234]  15.75,54.36 0 top
U$92  [#XBEE_DIO9#62]  14.48,48.77 0 bottom
U$93  [#IOLED#5]  53.92,19.46 0 bottom
U$94  [IO49]  57.68,20.75 0 top
U$95  [SOURCE54]  51.94,29.34 0 top
U$96  [USB#C58]  34.8,62.74 0 top
U$97  [#I2C#33]  73.41,16.51 0 bottom
U$98  [D03]  112.78,14.48 90 top
U$99  [#RST#30]  61.98,14.48 90 top
U$100  [SFE_LOGO_FLAME_.2]  70.99,62.99 0 top
U$101  [#D1#AD1#8]  98.81,56.39 0 bottom
U$102  [#D2#AD2#19]  99.06,53.72 0 bottom
U$103  [#D3#AD3#23]  99.06,51.18 0 bottom
U$104  [#D6##RTS##25]  98.93,48.64 0 bottom
U$105  [#D5#ASSOC#25]  100.08,46.23 0 bottom
U$106  [#D9##SLP##28]  98.81,41.15 0 bottom
U$107  [#D7##CTS##26]  98.93,38.61 0 bottom
U$108  [#D4#PICO#25]  99.31,35.94 0 bottom
U$109  [#D8##DTR##27]  78.23,38.61 0 bottom
U$110  [#RSSI#D10#17]  77.85,46.23 0 bottom
U$111  [#SDA#D11#9]  78.11,43.69 0 bottom
U$112  [##RST##15]  79.63,48.64 0 bottom
U$113  [#POCI#D12#24]  77.72,51.31 0 bottom
U$114  [#RXI#D14#15]  78.23,53.72 0 bottom
U$115  [#TXO#D13#13]  77.72,56.39 0 bottom
U$116  [#ALED#21]  107.95,24.64 0 bottom
U$117  [#RLED#22]  108.05,22.1 0 bottom
U$118  [#TXO#8]  85.22,56.39 0 top
U$119  [#RXI#7]  84.81,53.82 0 top
U$120  [#POCI#32]  85.22,51.31 0 top
U$121  [##RST##13]  84.84,48.77 0 top
U$122  [#RSSI#16]  85.09,46.23 0 top
U$123  [#SDA#10]  84.96,43.69 0 top
U$124  [#ASSOC#28]  91.31,46.23 0 top
U$125  [##RTS##14]  92.33,48.77 0 top
U$126  [##CS##26]  92.84,51.18 0 top
U$127  [#SCLK#33]  91.95,53.72 0 top
U$128  [#SCL#9]  92.46,56.39 0 top
U$129  [#D0#3]  92.84,58.93 0 top
U$130  [#SHLD#36]  89.66,12.45 0 bottom
U$131  [#NC#1]  80.01,41.15 0 bottom
U$132  [#NC#3]  97.28,43.69 0 bottom
U$133  [#NC#3]  92.84,43.69 0 top
U$134  [#GND#0]  108.84,41.12 0 top
U$135  [#NC#1]  84.58,41.15 0 top
U$136  [#SDA#10]  65.79,22.1 0 top
U$137  [#SCL#7]  65.79,19.56 0 top
U$138  [#GND#0]  65.91,27.18 0 top
U$139  [#TXO#8]  66.04,64.01 0 top
U$140  [#RXI#7]  65.63,61.44 0 top
U$141  [#3V3#1]  84.96,58.93 0 top
U$142  [#GND#0]  79.6,36.07 0 top
U$143  [SFE_LOGO_NAME_.2]  88.65,65.28 0 bottom
U$144  [##SLP##28]  92.46,41.15 0 top
U$145  [ASC32]  111.51,26.16 0 top
U$146  [RSSI31]  111.51,23.37 0 top
U$147  [PWR29]  95,11.84 90 top
U$148  [#GND#0]  79.63,36.07 0 bottom
U$149  [#3V3#1]  79.63,58.8 0 bottom
U$150  [#D0#AD0#18]  99.06,58.93 0 bottom
U$151  [ARDUINO1345]  88.65,65.28 0 top
U$152  [XBEE340]  81.03,65.28 0 top
U$153  [SHIELD1346]  96.27,65.28 0 top
U$154  [#5V#5]  109.35,38.61 0 top
U$155  [##DTR##27]  79.68,38.53 0 top
U$156  [##CTS##28]  97.54,38.61 0 top
U$157  [#GND#0]  108.81,43.64 0 top
U$158  [#3V3#1]  105.92,37.85 0 top
U$159  [#PLED#20]  99.87,12.4 0 bottom
U$160  [#IOLED#5]  107.77,19.46 0 bottom
U$161  [IO49]  111.53,20.75 0 top
U$162  [VIN5]  109.88,47.5 0 top
U$163  [#PICO#27]  97.94,35.92 0 top
U$164  [#X1#10]  103.89,40.08 90 top
U$165  [#GND#0]  108.86,43.64 0 bottom
U$166  [#GND#0]  108.84,41.12 0 bottom
U$167  [#5V#5]  109.35,38.61 0 bottom
U$168  [#SDA#9]  65.79,22.1 0 bottom
U$169  [#SCL#13]  65.79,19.56 0 bottom
U$170  [#GND#0]  65.91,27.18 0 bottom
U$171  [#EN#15]  65.41,51.31 0 bottom
U$172  [#3V3#1]  108.89,36.07 0 bottom
U$173  [##RST##13]  108.84,33.53 0 bottom
U$174  [#VIN#4]  109.09,46.23 0 bottom
U$175  [#UART#4048234]  69.6,54.36 0 top
U$176  [POWER49]  88.65,17.02 0 top
U$177  [DRX52]  65.79,59.56 0 top
U$178  [DTX53]  65.79,55.5 0 top
U$179  [DLINE45]  65.91,48.77 0 top
U$180  [UART44]  65.91,51.31 0 top
U$181  [#DRX#56]  70.87,42.04 90 top
U$182  [#DTX#57]  67.06,41.91 90 top
U$183  [#TXO#61]  66.04,64.01 0 bottom
U$184  [#RXI#60]  65.66,61.47 0 bottom
U$185  [#DRX#56]  65.79,58.93 0 bottom
U$186  [#DTX#57]  65.91,56.39 0 bottom
U$187  [#XBEE_DIO0#62]  68.2,46.23 0 bottom
U$188  [#XBEE_DIO9#62]  68.33,48.77 0 bottom
U$189  [SOURCE54]  105.79,29.34 0 top
U$190  [SHIELD55]  102.11,34.8 0 top
U$191  [R3#R455]  101.73,32.26 0 top
U$192  [USB#C58]  88.65,62.74 0 top
U$193  [#I2C#33]  19.56,79.25 0 bottom
U$194  [D03]  58.93,77.22 90 top
U$195  [#RST#30]  8.13,77.22 90 top
U$196  [SFE_LOGO_FLAME_.2]  17.14,125.73 0 top
U$197  [#D1#AD1#8]  44.96,119.13 0 bottom
U$198  [#D2#AD2#19]  45.21,116.46 0 bottom
U$199  [#D3#AD3#23]  45.21,113.92 0 bottom
U$200  [#D6##RTS##25]  45.08,111.38 0 bottom
U$201  [#D5#ASSOC#25]  46.23,108.97 0 bottom
U$202  [#D9##SLP##28]  44.96,103.89 0 bottom
U$203  [#D7##CTS##26]  45.08,101.35 0 bottom
U$204  [#D4#PICO#25]  45.47,98.68 0 bottom
U$205  [#D8##DTR##27]  24.38,101.35 0 bottom
U$206  [#RSSI#D10#17]  24,108.97 0 bottom
U$207  [#SDA#D11#9]  24.26,106.43 0 bottom
U$208  [##RST##15]  25.78,111.38 0 bottom
U$209  [#POCI#D12#24]  23.88,114.05 0 bottom
U$210  [#RXI#D14#15]  24.38,116.46 0 bottom
U$211  [#TXO#D13#13]  23.88,119.13 0 bottom
U$212  [#ALED#21]  54.1,87.38 0 bottom
U$213  [#RLED#22]  54.2,84.84 0 bottom
U$214  [#TXO#8]  31.37,119.13 0 top
U$215  [#RXI#7]  30.96,116.56 0 top
U$216  [#POCI#32]  31.37,114.05 0 top
U$217  [##RST##13]  30.99,111.51 0 top
U$218  [#RSSI#16]  31.24,108.97 0 top
U$219  [#SDA#10]  31.12,106.43 0 top
U$220  [#ASSOC#28]  37.46,108.97 0 top
U$221  [##RTS##14]  38.48,111.51 0 top
U$222  [##CS##26]  38.99,113.92 0 top
U$223  [#SCLK#33]  38.1,116.46 0 top
U$224  [#SCL#9]  38.61,119.13 0 top
U$225  [#D0#3]  38.99,121.67 0 top
U$226  [#SHLD#36]  35.81,75.18 0 bottom
U$227  [#NC#1]  26.16,103.89 0 bottom
U$228  [#NC#3]  43.43,106.43 0 bottom
U$229  [#NC#3]  38.99,106.43 0 top
U$230  [#GND#0]  54.99,103.86 0 top
U$231  [#NC#1]  30.73,103.89 0 top
U$232  [#SDA#10]  11.94,84.84 0 top
U$233  [#SCL#7]  11.94,82.3 0 top
U$234  [#GND#0]  12.06,89.92 0 top
U$235  [#TXO#8]  12.19,126.75 0 top
U$236  [#RXI#7]  11.79,124.18 0 top
U$237  [#3V3#1]  31.12,121.67 0 top
U$238  [#GND#0]  25.76,98.81 0 top
U$239  [SFE_LOGO_NAME_.2]  34.8,128.02 0 bottom
U$240  [##SLP##28]  38.61,103.89 0 top
U$241  [ASC32]  57.66,88.9 0 top
U$242  [RSSI31]  57.66,86.11 0 top
U$243  [PWR29]  41.15,74.57 90 top
U$244  [#GND#0]  25.78,98.81 0 bottom
U$245  [#3V3#1]  25.78,121.54 0 bottom
U$246  [#D0#AD0#18]  45.21,121.67 0 bottom
U$247  [ARDUINO1345]  34.8,128.02 0 top
U$248  [XBEE340]  27.18,128.02 0 top
U$249  [SHIELD1346]  42.42,128.02 0 top
U$250  [#5V#5]  55.5,101.35 0 top
U$251  [##DTR##27]  25.83,101.27 0 top
U$252  [##CTS##28]  43.69,101.35 0 top
U$253  [#GND#0]  54.97,106.38 0 top
U$254  [#3V3#1]  52.07,100.58 0 top
U$255  [#PLED#20]  46.02,75.13 0 bottom
U$256  [#IOLED#5]  53.92,82.19 0 bottom
U$257  [IO49]  57.68,83.49 0 top
U$258  [VIN5]  56.03,110.24 0 top
U$259  [#PICO#27]  44.09,98.65 0 top
U$260  [#X1#10]  50.04,102.82 90 top
U$261  [#GND#0]  55.02,106.38 0 bottom
U$262  [#GND#0]  54.99,103.86 0 bottom
U$263  [#5V#5]  55.5,101.35 0 bottom
U$264  [#SDA#9]  11.94,84.84 0 bottom
U$265  [#SCL#13]  11.94,82.3 0 bottom
U$266  [#GND#0]  12.06,89.92 0 bottom
U$267  [#EN#15]  11.56,114.05 0 bottom
U$268  [#3V3#1]  55.04,98.81 0 bottom
U$269  [##RST##13]  54.99,96.27 0 bottom
U$270  [#VIN#4]  55.24,108.97 0 bottom
U$271  [#UART#4048234]  15.75,117.09 0 top
U$272  [POWER49]  34.8,79.76 0 top
U$273  [DRX52]  11.94,122.3 0 top
U$274  [DTX53]  11.94,118.24 0 top
U$275  [DLINE45]  12.06,111.51 0 top
U$276  [UART44]  12.06,114.05 0 top
U$277  [#DRX#56]  17.02,104.77 90 top
U$278  [#DTX#57]  13.21,104.65 90 top
U$279  [#TXO#61]  12.19,126.75 0 bottom
U$280  [#RXI#60]  11.81,124.21 0 bottom
U$281  [#DRX#56]  11.94,121.67 0 bottom
U$282  [#DTX#57]  12.06,119.13 0 bottom
U$283  [#XBEE_DIO0#62]  14.35,108.97 0 bottom
U$284  [#XBEE_DIO9#62]  14.48,111.51 0 bottom
U$285  [SOURCE54]  51.94,92.08 0 top
U$286  [SHIELD55]  48.26,97.54 0 top
U$287  [R3#R455]  47.88,95 0 top
U$288  [USB#C58]  34.8,125.48 0 top
U$289  [#I2C#33]  73.41,79.25 0 bottom
U$290  [D03]  112.78,77.22 90 top
U$291  [#RST#30]  61.98,77.22 90 top
U$292  [SFE_LOGO_FLAME_.2]  70.99,125.73 0 top
U$293  [#D1#AD1#8]  98.81,119.13 0 bottom
U$294  [#D2#AD2#19]  99.06,116.46 0 bottom
U$295  [#D3#AD3#23]  99.06,113.92 0 bottom
U$296  [#D6##RTS##25]  98.93,111.38 0 bottom
U$297  [#D5#ASSOC#25]  100.08,108.97 0 bottom
U$298  [#D9##SLP##28]  98.81,103.89 0 bottom
U$299  [#D7##CTS##26]  98.93,101.35 0 bottom
U$300  [#D4#PICO#25]  99.31,98.68 0 bottom
U$301  [#D8##DTR##27]  78.23,101.35 0 bottom
U$302  [#RSSI#D10#17]  77.85,108.97 0 bottom
U$303  [#SDA#D11#9]  78.11,106.43 0 bottom
U$304  [##RST##15]  79.63,111.38 0 bottom
U$305  [#POCI#D12#24]  77.72,114.05 0 bottom
U$306  [#RXI#D14#15]  78.23,116.46 0 bottom
U$307  [#TXO#D13#13]  77.72,119.13 0 bottom
U$308  [#ALED#21]  107.95,87.38 0 bottom
U$309  [#RLED#22]  108.05,84.84 0 bottom
U$310  [#TXO#8]  85.22,119.13 0 top
U$311  [#RXI#7]  84.81,116.56 0 top
U$312  [#POCI#32]  85.22,114.05 0 top
U$313  [##RST##13]  84.84,111.51 0 top
U$314  [#RSSI#16]  85.09,108.97 0 top
U$315  [#SDA#10]  84.96,106.43 0 top
U$316  [#ASSOC#28]  91.31,108.97 0 top
U$317  [##RTS##14]  92.33,111.51 0 top
U$318  [##CS##26]  92.84,113.92 0 top
U$319  [#SCLK#33]  91.95,116.46 0 top
U$320  [#SCL#9]  92.46,119.13 0 top
U$321  [#D0#3]  92.84,121.67 0 top
U$322  [#SHLD#36]  89.66,75.18 0 bottom
U$323  [#NC#1]  80.01,103.89 0 bottom
U$324  [#NC#3]  97.28,106.43 0 bottom
U$325  [#NC#3]  92.84,106.43 0 top
U$326  [#GND#0]  108.84,103.86 0 top
U$327  [#NC#1]  84.58,103.89 0 top
U$328  [#SDA#10]  65.79,84.84 0 top
U$329  [#SCL#7]  65.79,82.3 0 top
U$330  [#GND#0]  65.91,89.92 0 top
U$331  [#TXO#8]  66.04,126.75 0 top
U$332  [#RXI#7]  65.63,124.18 0 top
U$333  [#3V3#1]  84.96,121.67 0 top
U$334  [#GND#0]  79.6,98.81 0 top
U$335  [SFE_LOGO_NAME_.2]  88.65,128.02 0 bottom
U$336  [##SLP##28]  92.46,103.89 0 top
U$337  [ASC32]  111.51,88.9 0 top
U$338  [RSSI31]  111.51,86.11 0 top
U$339  [PWR29]  95,74.57 90 top
U$340  [#GND#0]  79.63,98.81 0 bottom
U$341  [#3V3#1]  79.63,121.54 0 bottom
U$342  [#D0#AD0#18]  99.06,121.67 0 bottom
U$343  [ARDUINO1345]  88.65,128.02 0 top
U$344  [XBEE340]  81.03,128.02 0 top
U$345  [SHIELD1346]  96.27,128.02 0 top
U$346  [#5V#5]  109.35,101.35 0 top
U$347  [##DTR##27]  79.68,101.27 0 top
U$348  [##CTS##28]  97.54,101.35 0 top
U$349  [#GND#0]  108.81,106.38 0 top
U$350  [#3V3#1]  105.92,100.58 0 top
U$351  [#PLED#20]  99.87,75.13 0 bottom
U$352  [#IOLED#5]  107.77,82.19 0 bottom
U$353  [IO49]  111.53,83.49 0 top
U$354  [VIN5]  109.88,110.24 0 top
U$355  [#PICO#27]  97.94,98.65 0 top
U$356  [#X1#10]  103.89,102.82 90 top
U$357  [#GND#0]  108.86,106.38 0 bottom
U$358  [#GND#0]  108.84,103.86 0 bottom
U$359  [#5V#5]  109.35,101.35 0 bottom
U$360  [#SDA#9]  65.79,84.84 0 bottom
U$361  [#SCL#13]  65.79,82.3 0 bottom
U$362  [#GND#0]  65.91,89.92 0 bottom
U$363  [#EN#15]  65.41,114.05 0 bottom
U$364  [#3V3#1]  108.89,98.81 0 bottom
U$365  [##RST##13]  108.84,96.27 0 bottom
U$366  [#VIN#4]  109.09,108.97 0 bottom
U$367  [#UART#4048234]  69.6,117.09 0 top
U$368  [POWER49]  88.65,79.76 0 top
U$369  [DRX52]  65.79,122.3 0 top
U$370  [DTX53]  65.79,118.24 0 top
U$371  [DLINE45]  65.91,111.51 0 top
U$372  [UART44]  65.91,114.05 0 top
U$373  [#DRX#56]  70.87,104.77 90 top
U$374  [#DTX#57]  67.06,104.65 90 top
U$375  [#TXO#61]  66.04,126.75 0 bottom
U$376  [#RXI#60]  65.66,124.21 0 bottom
U$377  [#DRX#56]  65.79,121.67 0 bottom
U$378  [#DTX#57]  65.91,119.13 0 bottom
U$379  [#XBEE_DIO0#62]  68.2,108.97 0 bottom
U$380  [#XBEE_DIO9#62]  68.33,111.51 0 bottom
U$381  [SOURCE54]  105.79,92.08 0 top
U$382  [SHIELD55]  102.11,97.54 0 top
U$383  [R3#R455]  101.73,95 0 top
U$384  [USB#C58]  88.65,125.48 0 top
U$385  [#I2C#33]  19.56,141.99 0 bottom
U$386  [D03]  58.93,139.95 90 top
U$387  [#RST#30]  8.13,139.95 90 top
U$388  [SFE_LOGO_FLAME_.2]  17.14,188.47 0 top
U$389  [#D1#AD1#8]  44.96,181.86 0 bottom
U$390  [#D2#AD2#19]  45.21,179.2 0 bottom
U$391  [#D3#AD3#23]  45.21,176.66 0 bottom
U$392  [#D6##RTS##25]  45.08,174.12 0 bottom
U$393  [#D5#ASSOC#25]  46.23,171.7 0 bottom
U$394  [#D9##SLP##28]  44.96,166.62 0 bottom
U$395  [#D7##CTS##26]  45.08,164.08 0 bottom
U$396  [#D4#PICO#25]  45.47,161.42 0 bottom
U$397  [#D8##DTR##27]  24.38,164.08 0 bottom
U$398  [#RSSI#D10#17]  24,171.7 0 bottom
U$399  [#SDA#D11#9]  24.26,169.16 0 bottom
U$400  [##RST##15]  25.78,174.12 0 bottom
U$401  [#POCI#D12#24]  23.88,176.78 0 bottom
U$402  [#RXI#D14#15]  24.38,179.2 0 bottom
U$403  [#TXO#D13#13]  23.88,181.86 0 bottom
U$404  [#ALED#21]  54.1,150.11 0 bottom
U$405  [#RLED#22]  54.2,147.57 0 bottom
U$406  [#TXO#8]  31.37,181.86 0 top
U$407  [#RXI#7]  30.96,179.3 0 top
U$408  [#POCI#32]  31.37,176.78 0 top
U$409  [##RST##13]  30.99,174.24 0 top
U$410  [#RSSI#16]  31.24,171.7 0 top
U$411  [#SDA#10]  31.12,169.16 0 top
U$412  [#ASSOC#28]  37.46,171.7 0 top
U$413  [##RTS##14]  38.48,174.24 0 top
U$414  [##CS##26]  38.99,176.66 0 top
U$415  [#SCLK#33]  38.1,179.2 0 top
U$416  [#SCL#9]  38.61,181.86 0 top
U$417  [#D0#3]  38.99,184.4 0 top
U$418  [#SHLD#36]  35.81,137.92 0 bottom
U$419  [#NC#1]  26.16,166.62 0 bottom
U$420  [#NC#3]  43.43,169.16 0 bottom
U$421  [#NC#3]  38.99,169.16 0 top
U$422  [#GND#0]  54.99,166.6 0 top
U$423  [#NC#1]  30.73,166.62 0 top
U$424  [#SDA#10]  11.94,147.57 0 top
U$425  [#SCL#7]  11.94,145.03 0 top
U$426  [#GND#0]  12.06,152.65 0 top
U$427  [#TXO#8]  12.19,189.48 0 top
U$428  [#RXI#7]  11.79,186.92 0 top
U$429  [#3V3#1]  31.12,184.4 0 top
U$430  [#GND#0]  25.76,161.54 0 top
U$431  [SFE_LOGO_NAME_.2]  34.8,190.75 0 bottom
U$432  [##SLP##28]  38.61,166.62 0 top
U$433  [ASC32]  57.66,151.64 0 top
U$434  [RSSI31]  57.66,148.84 0 top
U$435  [PWR29]  41.15,137.31 90 top
U$436  [#GND#0]  25.78,161.54 0 bottom
U$437  [#3V3#1]  25.78,184.28 0 bottom
U$438  [#D0#AD0#18]  45.21,184.4 0 bottom
U$439  [ARDUINO1345]  34.8,190.75 0 top
U$440  [XBEE340]  27.18,190.75 0 top
U$441  [SHIELD1346]  42.42,190.75 0 top
U$442  [#5V#5]  55.5,164.08 0 top
U$443  [##DTR##27]  25.83,164.01 0 top
U$444  [##CTS##28]  43.69,164.08 0 top
U$445  [#GND#0]  54.97,169.11 0 top
U$446  [#3V3#1]  52.07,163.32 0 top
U$447  [#PLED#20]  46.02,137.87 0 bottom
U$448  [#IOLED#5]  53.92,144.93 0 bottom
U$449  [IO49]  57.68,146.23 0 top
U$450  [VIN5]  56.03,172.97 0 top
U$451  [#PICO#27]  44.09,161.39 0 top
U$452  [#X1#10]  50.04,165.56 90 top
U$453  [#GND#0]  55.02,169.11 0 bottom
U$454  [#GND#0]  54.99,166.6 0 bottom
U$455  [#5V#5]  55.5,164.08 0 bottom
U$456  [#SDA#9]  11.94,147.57 0 bottom
U$457  [#SCL#13]  11.94,145.03 0 bottom
U$458  [#GND#0]  12.06,152.65 0 bottom
U$459  [#EN#15]  11.56,176.78 0 bottom
U$460  [#3V3#1]  55.04,161.54 0 bottom
U$461  [##RST##13]  54.99,159 0 bottom
U$462  [#VIN#4]  55.24,171.7 0 bottom
U$463  [#UART#4048234]  15.75,179.83 0 top
U$464  [POWER49]  34.8,142.49 0 top
U$465  [DRX52]  11.94,185.04 0 top
U$466  [DTX53]  11.94,180.97 0 top
U$467  [DLINE45]  12.06,174.24 0 top
U$468  [UART44]  12.06,176.78 0 top
U$469  [#DRX#56]  17.02,167.51 90 top
U$470  [#DTX#57]  13.21,167.39 90 top
U$471  [#TXO#61]  12.19,189.48 0 bottom
U$472  [#RXI#60]  11.81,186.94 0 bottom
U$473  [#DRX#56]  11.94,184.4 0 bottom
U$474  [#DTX#57]  12.06,181.86 0 bottom
U$475  [#XBEE_DIO0#62]  14.35,171.7 0 bottom
U$476  [#XBEE_DIO9#62]  14.48,174.24 0 bottom
U$477  [SOURCE54]  51.94,154.81 0 top
U$478  [SHIELD55]  48.26,160.27 0 top
U$479  [R3#R455]  47.88,157.73 0 top
U$480  [USB#C58]  34.8,188.21 0 top
U$481  [#I2C#33]  73.41,141.99 0 bottom
U$482  [D03]  112.78,139.95 90 top
U$483  [#RST#30]  61.98,139.95 90 top
U$484  [SFE_LOGO_FLAME_.2]  70.99,188.47 0 top
U$485  [#D1#AD1#8]  98.81,181.86 0 bottom
U$486  [#D2#AD2#19]  99.06,179.2 0 bottom
U$487  [#D3#AD3#23]  99.06,176.66 0 bottom
U$488  [#D6##RTS##25]  98.93,174.12 0 bottom
U$489  [#D5#ASSOC#25]  100.08,171.7 0 bottom
U$490  [#D9##SLP##28]  98.81,166.62 0 bottom
U$491  [#D7##CTS##26]  98.93,164.08 0 bottom
U$492  [#D4#PICO#25]  99.31,161.42 0 bottom
U$493  [#D8##DTR##27]  78.23,164.08 0 bottom
U$494  [#RSSI#D10#17]  77.85,171.7 0 bottom
U$495  [#SDA#D11#9]  78.11,169.16 0 bottom
U$496  [##RST##15]  79.63,174.12 0 bottom
U$497  [#POCI#D12#24]  77.72,176.78 0 bottom
U$498  [#RXI#D14#15]  78.23,179.2 0 bottom
U$499  [#TXO#D13#13]  77.72,181.86 0 bottom
U$500  [#ALED#21]  107.95,150.11 0 bottom
U$501  [#RLED#22]  108.05,147.57 0 bottom
U$502  [#TXO#8]  85.22,181.86 0 top
U$503  [#RXI#7]  84.81,179.3 0 top
U$504  [#POCI#32]  85.22,176.78 0 top
U$505  [##RST##13]  84.84,174.24 0 top
U$506  [#RSSI#16]  85.09,171.7 0 top
U$507  [#SDA#10]  84.96,169.16 0 top
U$508  [#ASSOC#28]  91.31,171.7 0 top
U$509  [##RTS##14]  92.33,174.24 0 top
U$510  [##CS##26]  92.84,176.66 0 top
U$511  [#SCLK#33]  91.95,179.2 0 top
U$512  [#SCL#9]  92.46,181.86 0 top
U$513  [#D0#3]  92.84,184.4 0 top
U$514  [#SHLD#36]  89.66,137.92 0 bottom
U$515  [#NC#1]  80.01,166.62 0 bottom
U$516  [#NC#3]  97.28,169.16 0 bottom
U$517  [#NC#3]  92.84,169.16 0 top
U$518  [#GND#0]  108.84,166.6 0 top
U$519  [#NC#1]  84.58,166.62 0 top
U$520  [#SDA#10]  65.79,147.57 0 top
U$521  [#SCL#7]  65.79,145.03 0 top
U$522  [#GND#0]  65.91,152.65 0 top
U$523  [#TXO#8]  66.04,189.48 0 top
U$524  [#RXI#7]  65.63,186.92 0 top
U$525  [#3V3#1]  84.96,184.4 0 top
U$526  [#GND#0]  79.6,161.54 0 top
U$527  [SFE_LOGO_NAME_.2]  88.65,190.75 0 bottom
U$528  [##SLP##28]  92.46,166.62 0 top
U$529  [ASC32]  111.51,151.64 0 top
U$530  [RSSI31]  111.51,148.84 0 top
U$531  [PWR29]  95,137.31 90 top
U$532  [#GND#0]  79.63,161.54 0 bottom
U$533  [#3V3#1]  79.63,184.28 0 bottom
U$534  [#D0#AD0#18]  99.06,184.4 0 bottom
U$535  [ARDUINO1345]  88.65,190.75 0 top
U$536  [XBEE340]  81.03,190.75 0 top
U$537  [SHIELD1346]  96.27,190.75 0 top
U$538  [#5V#5]  109.35,164.08 0 top
U$539  [##DTR##27]  79.68,164.01 0 top
U$540  [##CTS##28]  97.54,164.08 0 top
U$541  [#GND#0]  108.81,169.11 0 top
U$542  [#3V3#1]  105.92,163.32 0 top
U$543  [#PLED#20]  99.87,137.87 0 bottom
U$544  [#IOLED#5]  107.77,144.93 0 bottom
U$545  [IO49]  111.53,146.23 0 top
U$546  [VIN5]  109.88,172.97 0 top
U$547  [#PICO#27]  97.94,161.39 0 top
U$548  [#X1#10]  103.89,165.56 90 top
U$549  [#GND#0]  108.86,169.11 0 bottom
U$550  [#GND#0]  108.84,166.6 0 bottom
U$551  [#5V#5]  109.35,164.08 0 bottom
U$552  [#SDA#9]  65.79,147.57 0 bottom
U$553  [#SCL#13]  65.79,145.03 0 bottom
U$554  [#GND#0]  65.91,152.65 0 bottom
U$555  [#EN#15]  65.41,176.78 0 bottom
U$556  [#3V3#1]  108.89,161.54 0 bottom
U$557  [##RST##13]  108.84,159 0 bottom
U$558  [#VIN#4]  109.09,171.7 0 bottom
U$559  [#UART#4048234]  69.6,179.83 0 top
U$560  [POWER49]  88.65,142.49 0 top
U$561  [DRX52]  65.79,185.04 0 top
U$562  [DTX53]  65.79,180.97 0 top
U$563  [DLINE45]  65.91,174.24 0 top
U$564  [UART44]  65.91,176.78 0 top
U$565  [#DRX#56]  70.87,167.51 90 top
U$566  [#DTX#57]  67.06,167.39 90 top
U$567  [#TXO#61]  66.04,189.48 0 bottom
U$568  [#RXI#60]  65.66,186.94 0 bottom
U$569  [#DRX#56]  65.79,184.4 0 bottom
U$570  [#DTX#57]  65.91,181.86 0 bottom
U$571  [#XBEE_DIO0#62]  68.2,171.7 0 bottom
U$572  [#XBEE_DIO9#62]  68.33,174.24 0 bottom
U$573  [SOURCE54]  105.79,154.81 0 top
U$574  [SHIELD55]  102.11,160.27 0 top
U$575  [R3#R455]  101.73,157.73 0 top
U$576  [USB#C58]  88.65,188.21 0 top
UART  USB Female Type C Connector  [USB-C-16P-4LAYER-ISOLATED]  34.8,15.75 0 top
UART1  USB Female Type C Connector  [USB-C-16P-4LAYER-ISOLATED]  88.65,15.75 0 top
UART2  USB Female Type C Connector  [USB-C-16P-4LAYER-ISOLATED]  34.8,78.49 0 top
UART3  USB Female Type C Connector  [USB-C-16P-4LAYER-ISOLATED]  88.65,78.49 0 top
UART4  USB Female Type C Connector  [USB-C-16P-4LAYER-ISOLATED]  34.8,141.22 0 top
UART5  USB Female Type C Connector  [USB-C-16P-4LAYER-ISOLATED]  88.65,141.22 0 top
X1  JUMPER-SMT_2_NO_SILK  [SMT-JUMPER_2_NO_SILK]  50.04,42.42 90 top
X2  JUMPER-SMT_2_NO_SILK  [SMT-JUMPER_2_NO_SILK]  103.89,42.42 90 top
X3  JUMPER-SMT_2_NO_SILK  [SMT-JUMPER_2_NO_SILK]  50.04,105.16 90 top
X4  JUMPER-SMT_2_NO_SILK  [SMT-JUMPER_2_NO_SILK]  103.89,105.16 90 top
X5  JUMPER-SMT_2_NO_SILK  [SMT-JUMPER_2_NO_SILK]  50.04,167.89 90 top
X6  JUMPER-SMT_2_NO_SILK  [SMT-JUMPER_2_NO_SILK]  103.89,167.89 90 top